# EAGLE board 13826-SparkFun_Tri_Axis_Accel_Breakout-H3LIS331DL_panel.v10 (EAGLE 7.5.0), part 1 of 4
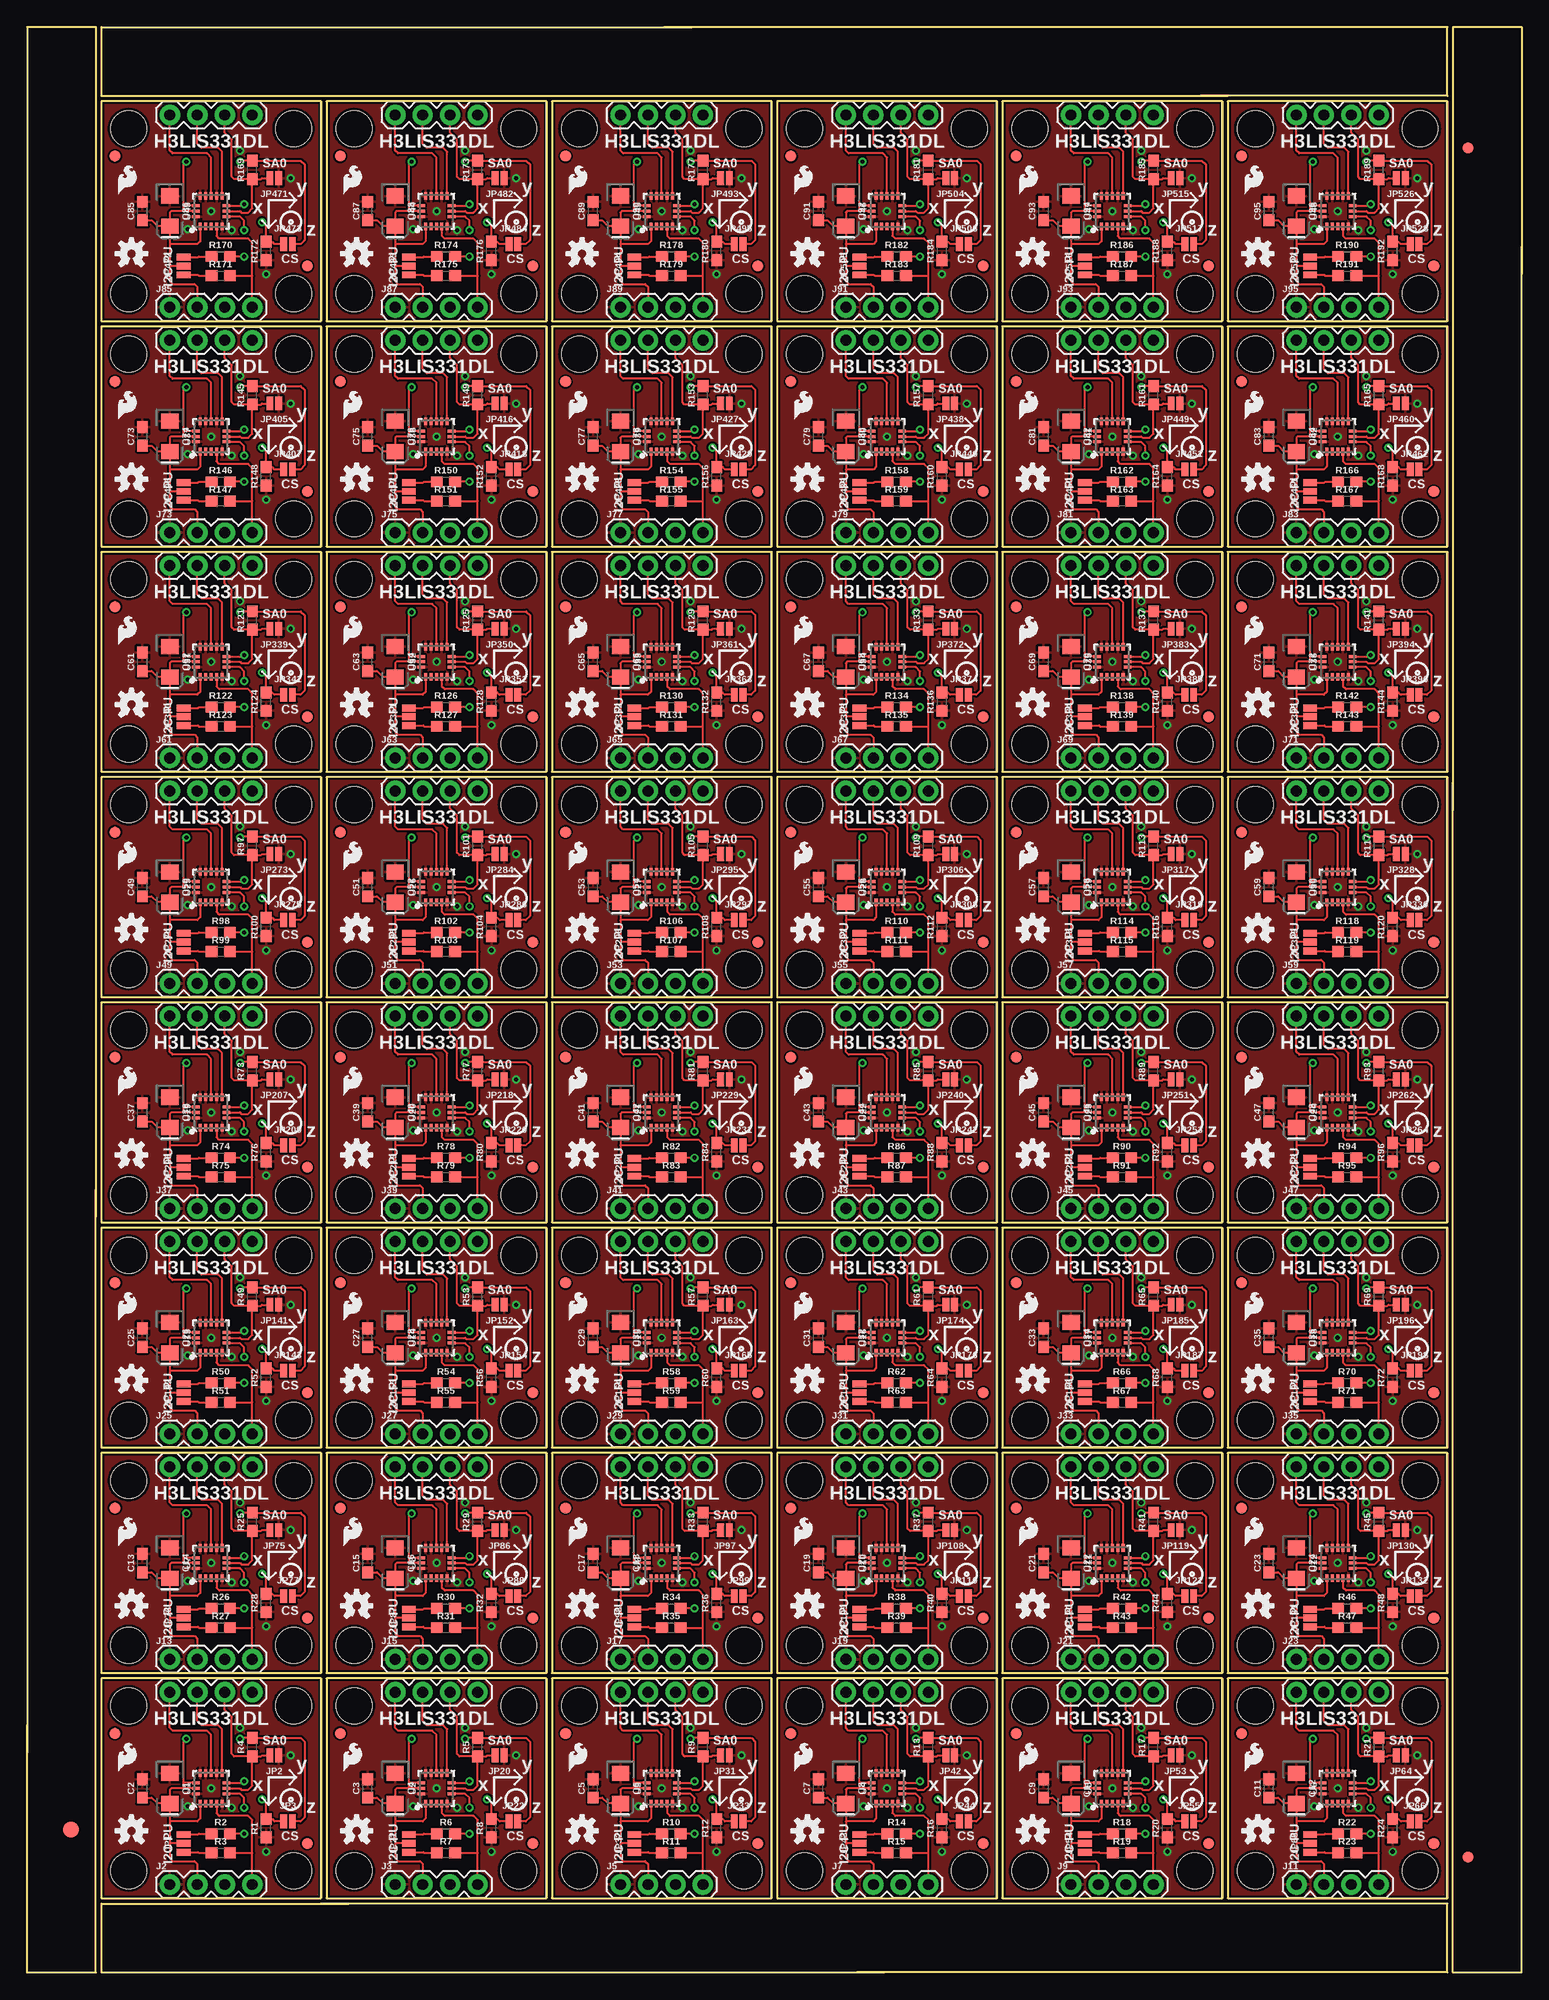
[diagram p0: board, top side]
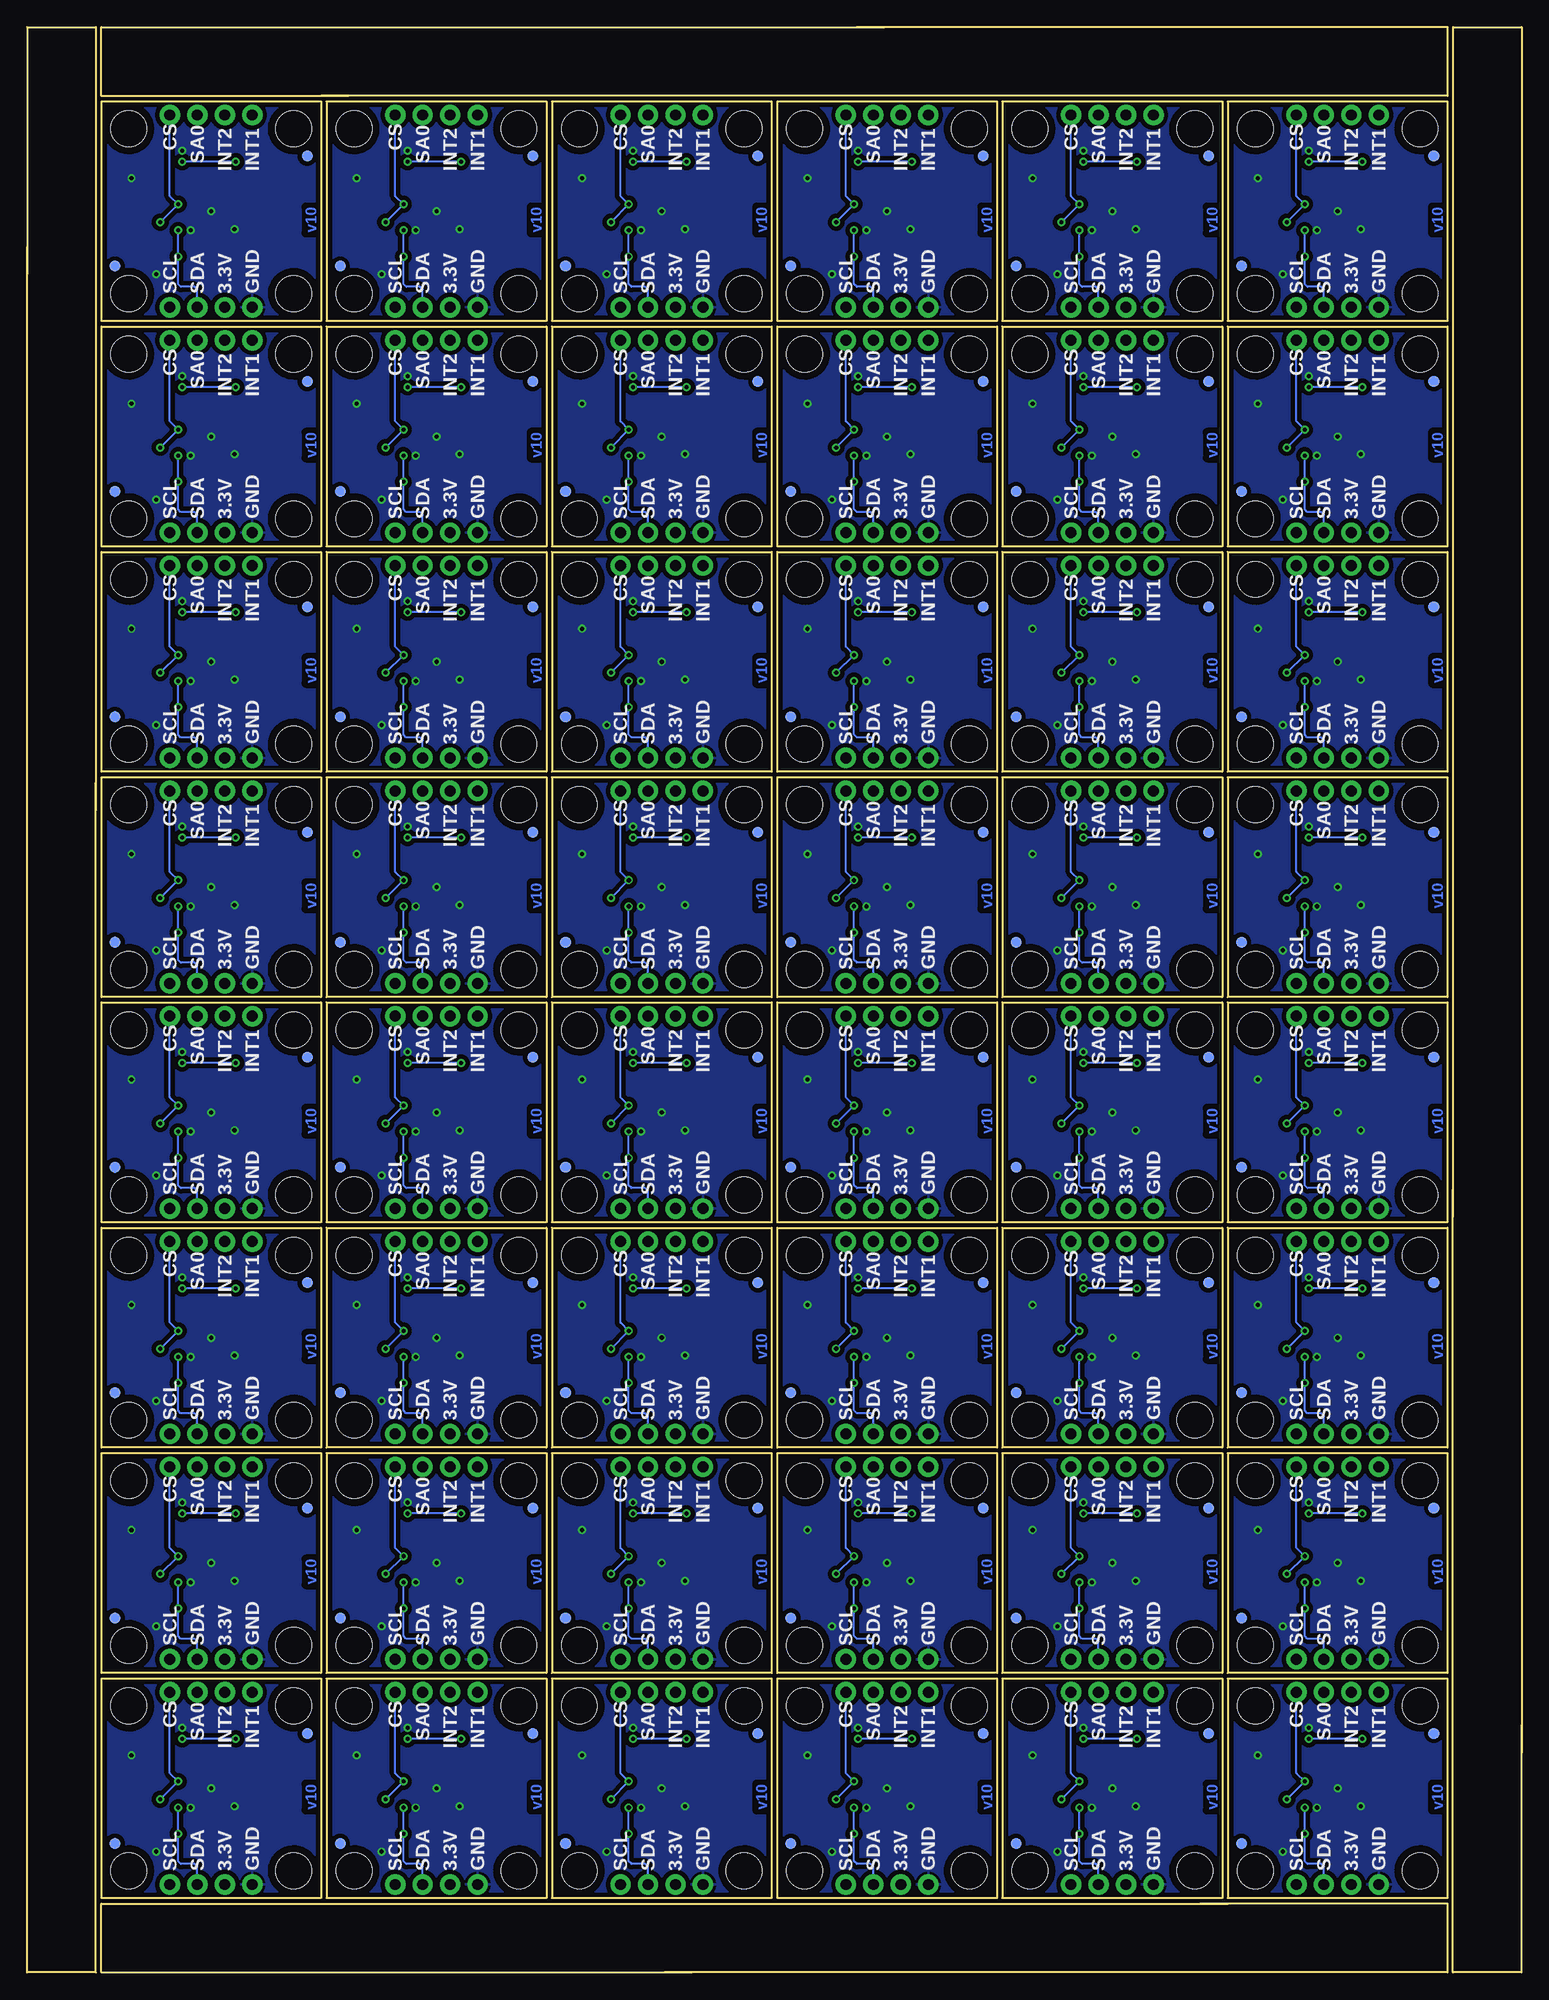
[diagram p1: board, bottom side, seen from below]

Size 138.18 x 179.83 mm. Coordinates in mm from the lower left corner, seen from the top.
Outline: 216 segments
Copper layers (1*16): Top 0.035mm / dielectric 1.5mm / Bottom 0.035mm
Design rules "SparkFun-2-layer-TIGHT": minimum track width 7mil, minimum drill 15mil, track to track 7mil, track to pad 7mil, pad to pad 7mil, via to via 7mil, smd to smd 7mil, copper to edge 7mil, drill to drill 7mil, minimum pad ring 7mil, minimum via ring 7mil, stop-mask expansion 4mil, vias tented up to drill 25mil, thermal gap 10mil
tRestrict: 48 lines

## Footprints (pad centres in the part's own frame; a part is rotated, then mirrored left to right if it is on the bottom)
EIA3216 = smd 1.4 x 1.6: + 1.4,0; - -1.4,0
0603 = smd 1.1 x 1: 1 -0.85,0; 2 0.85,0
FIDUCIAL-1.5X3 = smd 1.5 x 1.5: 1 0,0
FIDUCIAL-1X2 = smd 1 x 1: 1 0,0
1X04 = drill 1.016 pad 1.88: 1 0,0; 2 2.54,0; 3 5.08,0; 4 7.62,0
SMT-JUMPER_3_2-NC_PASTE_NO-SILK = smd 0.635 x 1.27: 1 -0.813,0; 2 0,0; 3 0.813,0
SMT-JUMPER_2_NO_NO-SILK = smd 0.635 x 1.27: 1 -0.406,0; 2 0.406,0
SMT-JUMPER_2_NC_PASTE_NO-SILK = smd 0.635 x 1.27: 1 -0.406,0; 2 0.406,0
STAND-OFF = hole 3.302: 0,0
LGA-16-3X3 = smd 0.7 x 0.28: 1 -1.4,1; 2 -1.4,0.5; 3 -1.4,0; 4 -1.4,-0.5; 5 -1.4,-1; 9 1.4,-1; 10 1.4,-0.5; 11 1.4,0; 12 1.4,0.5; 13 1.4,1 | smd 0.28 x 0.7: 6 -0.5,-1.4; 7 0,-1.4; 8 0.5,-1.4; 14 0.5,1.4; 15 0,1.4; 16 -0.5,1.4

## Placement (x,y rotation side)
C1  10uF  [EIA3216]  13.21,17.02 270 top
C2  0.1uF  [0603]  10.67,17.02 90 top
C3  0.1uF  [0603]  31.5,17.02 90 top
C4  10uF  [EIA3216]  34.04,17.02 270 top
C5  0.1uF  [0603]  52.32,17.02 90 top
C6  10uF  [EIA3216]  54.86,17.02 270 top
C7  0.1uF  [0603]  73.15,17.02 90 top
C8  10uF  [EIA3216]  75.69,17.02 270 top
C9  0.1uF  [0603]  93.98,17.02 90 top
C10  10uF  [EIA3216]  96.52,17.02 270 top
C11  0.1uF  [0603]  114.81,17.02 90 top
C12  10uF  [EIA3216]  117.35,17.02 270 top
C13  0.1uF  [0603]  10.67,37.85 90 top
C14  10uF  [EIA3216]  13.21,37.85 270 top
C15  0.1uF  [0603]  31.5,37.85 90 top
C16  10uF  [EIA3216]  34.04,37.85 270 top
C17  0.1uF  [0603]  52.32,37.85 90 top
C18  10uF  [EIA3216]  54.86,37.85 270 top
C19  0.1uF  [0603]  73.15,37.85 90 top
C20  10uF  [EIA3216]  75.69,37.85 270 top
C21  0.1uF  [0603]  93.98,37.85 90 top
C22  10uF  [EIA3216]  96.52,37.85 270 top
C23  0.1uF  [0603]  114.81,37.85 90 top
C24  10uF  [EIA3216]  117.35,37.85 270 top
C25  0.1uF  [0603]  10.67,58.67 90 top
C26  10uF  [EIA3216]  13.21,58.67 270 top
C27  0.1uF  [0603]  31.5,58.67 90 top
C28  10uF  [EIA3216]  34.04,58.67 270 top
C29  0.1uF  [0603]  52.32,58.67 90 top
C30  10uF  [EIA3216]  54.86,58.67 270 top
C31  0.1uF  [0603]  73.15,58.67 90 top
C32  10uF  [EIA3216]  75.69,58.67 270 top
C33  0.1uF  [0603]  93.98,58.67 90 top
C34  10uF  [EIA3216]  96.52,58.67 270 top
C35  0.1uF  [0603]  114.81,58.67 90 top
C36  10uF  [EIA3216]  117.35,58.67 270 top
C37  0.1uF  [0603]  10.67,79.5 90 top
C38  10uF  [EIA3216]  13.21,79.5 270 top
C39  0.1uF  [0603]  31.5,79.5 90 top
C40  10uF  [EIA3216]  34.04,79.5 270 top
C41  0.1uF  [0603]  52.32,79.5 90 top
C42  10uF  [EIA3216]  54.86,79.5 270 top
C43  0.1uF  [0603]  73.15,79.5 90 top
C44  10uF  [EIA3216]  75.69,79.5 270 top
C45  0.1uF  [0603]  93.98,79.5 90 top
C46  10uF  [EIA3216]  96.52,79.5 270 top
C47  0.1uF  [0603]  114.81,79.5 90 top
C48  10uF  [EIA3216]  117.35,79.5 270 top
C49  0.1uF  [0603]  10.67,100.33 90 top
C50  10uF  [EIA3216]  13.21,100.33 270 top
C51  0.1uF  [0603]  31.5,100.33 90 top
C52  10uF  [EIA3216]  34.04,100.33 270 top
C53  0.1uF  [0603]  52.32,100.33 90 top
C54  10uF  [EIA3216]  54.86,100.33 270 top
C55  0.1uF  [0603]  73.15,100.33 90 top
C56  10uF  [EIA3216]  75.69,100.33 270 top
C57  0.1uF  [0603]  93.98,100.33 90 top
C58  10uF  [EIA3216]  96.52,100.33 270 top
C59  0.1uF  [0603]  114.81,100.33 90 top
C60  10uF  [EIA3216]  117.35,100.33 270 top
C61  0.1uF  [0603]  10.67,121.16 90 top
C62  10uF  [EIA3216]  13.21,121.16 270 top
C63  0.1uF  [0603]  31.5,121.16 90 top
C64  10uF  [EIA3216]  34.04,121.16 270 top
C65  0.1uF  [0603]  52.32,121.16 90 top
C66  10uF  [EIA3216]  54.86,121.16 270 top
C67  0.1uF  [0603]  73.15,121.16 90 top
C68  10uF  [EIA3216]  75.69,121.16 270 top
C69  0.1uF  [0603]  93.98,121.16 90 top
C70  10uF  [EIA3216]  96.52,121.16 270 top
C71  0.1uF  [0603]  114.81,121.16 90 top
C72  10uF  [EIA3216]  117.35,121.16 270 top
C73  0.1uF  [0603]  10.67,141.99 90 top
C74  10uF  [EIA3216]  13.21,141.99 270 top
C75  0.1uF  [0603]  31.5,141.99 90 top
C76  10uF  [EIA3216]  34.04,141.99 270 top
C77  0.1uF  [0603]  52.32,141.99 90 top
C78  10uF  [EIA3216]  54.86,141.99 270 top
C79  0.1uF  [0603]  73.15,141.99 90 top
C80  10uF  [EIA3216]  75.69,141.99 270 top
C81  0.1uF  [0603]  93.98,141.99 90 top
C82  10uF  [EIA3216]  96.52,141.99 270 top
C83  0.1uF  [0603]  114.81,141.99 90 top
C84  10uF  [EIA3216]  117.35,141.99 270 top
C85  0.1uF  [0603]  10.67,162.81 90 top
C86  10uF  [EIA3216]  13.21,162.81 270 top
C87  0.1uF  [0603]  31.5,162.81 90 top
C88  10uF  [EIA3216]  34.04,162.81 270 top
C89  0.1uF  [0603]  52.32,162.81 90 top
C90  10uF  [EIA3216]  54.86,162.81 270 top
C91  0.1uF  [0603]  73.15,162.81 90 top
C92  10uF  [EIA3216]  75.69,162.81 270 top
C93  0.1uF  [0603]  93.98,162.81 90 top
C94  10uF  [EIA3216]  96.52,162.81 270 top
C95  0.1uF  [0603]  114.81,162.81 90 top
C96  10uF  [EIA3216]  117.35,162.81 270 top
E$1  [FIDUCIAL-1.5X3]  4.06,13.21 0 top
E$5  [FIDUCIAL-1X2]  133.22,168.66 180 top
E$6  [FIDUCIAL-1X2]  133.22,10.67 0 top
J1  [1X04]  13.21,25.91 0 top
J2  [1X04]  13.21,8.13 0 top
J3  [1X04]  34.04,8.13 0 top
J4  [1X04]  34.04,25.91 0 top
J5  [1X04]  54.86,8.13 0 top
J6  [1X04]  54.86,25.91 0 top
J7  [1X04]  75.69,8.13 0 top
J8  [1X04]  75.69,25.91 0 top
J9  [1X04]  96.52,8.13 0 top
J10  [1X04]  96.52,25.91 0 top
J11  [1X04]  117.35,8.13 0 top
J12  [1X04]  117.35,25.91 0 top
J13  [1X04]  13.21,28.96 0 top
J14  [1X04]  13.21,46.74 0 top
J15  [1X04]  34.04,28.96 0 top
J16  [1X04]  34.04,46.74 0 top
J17  [1X04]  54.86,28.96 0 top
J18  [1X04]  54.86,46.74 0 top
J19  [1X04]  75.69,28.96 0 top
J20  [1X04]  75.69,46.74 0 top
J21  [1X04]  96.52,28.96 0 top
J22  [1X04]  96.52,46.74 0 top
J23  [1X04]  117.35,28.96 0 top
J24  [1X04]  117.35,46.74 0 top
J25  [1X04]  13.21,49.78 0 top
J26  [1X04]  13.21,67.56 0 top
J27  [1X04]  34.04,49.78 0 top
J28  [1X04]  34.04,67.56 0 top
J29  [1X04]  54.86,49.78 0 top
J30  [1X04]  54.86,67.56 0 top
J31  [1X04]  75.69,49.78 0 top
J32  [1X04]  75.69,67.56 0 top
J33  [1X04]  96.52,49.78 0 top
J34  [1X04]  96.52,67.56 0 top
J35  [1X04]  117.35,49.78 0 top
J36  [1X04]  117.35,67.56 0 top
J37  [1X04]  13.21,70.61 0 top
J38  [1X04]  13.21,88.39 0 top
J39  [1X04]  34.04,70.61 0 top
J40  [1X04]  34.04,88.39 0 top
J41  [1X04]  54.86,70.61 0 top
J42  [1X04]  54.86,88.39 0 top
J43  [1X04]  75.69,70.61 0 top
J44  [1X04]  75.69,88.39 0 top
J45  [1X04]  96.52,70.61 0 top
J46  [1X04]  96.52,88.39 0 top
J47  [1X04]  117.35,70.61 0 top
J48  [1X04]  117.35,88.39 0 top
J49  [1X04]  13.21,91.44 0 top
J50  [1X04]  13.21,109.22 0 top
J51  [1X04]  34.04,91.44 0 top
J52  [1X04]  34.04,109.22 0 top
J53  [1X04]  54.86,91.44 0 top
J54  [1X04]  54.86,109.22 0 top
J55  [1X04]  75.69,91.44 0 top
J56  [1X04]  75.69,109.22 0 top
J57  [1X04]  96.52,91.44 0 top
J58  [1X04]  96.52,109.22 0 top
J59  [1X04]  117.35,91.44 0 top
J60  [1X04]  117.35,109.22 0 top
J61  [1X04]  13.21,112.27 0 top
J62  [1X04]  13.21,130.05 0 top
J63  [1X04]  34.04,112.27 0 top
J64  [1X04]  34.04,130.05 0 top
J65  [1X04]  54.86,112.27 0 top
J66  [1X04]  54.86,130.05 0 top
J67  [1X04]  75.69,112.27 0 top
J68  [1X04]  75.69,130.05 0 top
J69  [1X04]  96.52,112.27 0 top
J70  [1X04]  96.52,130.05 0 top
J71  [1X04]  117.35,112.27 0 top
J72  [1X04]  117.35,130.05 0 top
J73  [1X04]  13.21,133.1 0 top
J74  [1X04]  13.21,150.88 0 top
J75  [1X04]  34.04,133.1 0 top
J76  [1X04]  34.04,150.88 0 top
J77  [1X04]  54.86,133.1 0 top
J78  [1X04]  54.86,150.88 0 top
J79  [1X04]  75.69,133.1 0 top
J80  [1X04]  75.69,150.88 0 top
J81  [1X04]  96.52,133.1 0 top
J82  [1X04]  96.52,150.88 0 top
J83  [1X04]  117.35,133.1 0 top
J84  [1X04]  117.35,150.88 0 top
J85  [1X04]  13.21,153.92 0 top
J86  [1X04]  13.21,171.7 0 top
J87  [1X04]  34.04,153.92 0 top
J88  [1X04]  34.04,171.7 0 top
J89  [1X04]  54.86,153.92 0 top
J90  [1X04]  54.86,171.7 0 top
J91  [1X04]  75.69,153.92 0 top
J92  [1X04]  75.69,171.7 0 top
J93  [1X04]  96.52,153.92 0 top
J94  [1X04]  96.52,171.7 0 top
J95  [1X04]  117.35,153.92 0 top
J96  [1X04]  117.35,171.7 0 top
JP1  JUMPER-SMT_3_2-NC_PASTE_NO-SILK  [SMT-JUMPER_3_2-NC_PASTE_NO-SILK]  14.48,11.94 90 top
JP2  JUMPER-SMT_2_NO_NO-SILK  [SMT-JUMPER_2_NO_NO-SILK]  22.86,20.07 180 top
JP3  JUMPER-SMT_2_NC_PASTE_NO-SILK  [SMT-JUMPER_2_NC_PASTE_NO-SILK]  24.13,13.97 0 top
JP4  FIDUCIAL1X2  [FIDUCIAL-1X2]  8.13,22.1 0 top
JP5  FIDUCIAL1X2  [FIDUCIAL-1X2]  8.13,22.1 0 bottom
JP6  FIDUCIAL1X2  [FIDUCIAL-1X2]  25.91,11.94 0 top
JP7  FIDUCIAL1X2  [FIDUCIAL-1X2]  25.91,11.94 0 bottom
JP8  STAND-OFF  [STAND-OFF]  24.64,9.4 0 top
JP9  STAND-OFF  [STAND-OFF]  9.4,9.4 0 top
JP10  STAND-OFF  [STAND-OFF]  24.64,24.64 0 top
JP11  STAND-OFF  [STAND-OFF]  9.4,24.64 0 top
JP12  STAND-OFF  [STAND-OFF]  30.23,24.64 0 top
JP13  STAND-OFF  [STAND-OFF]  45.47,24.64 0 top
JP14  FIDUCIAL1X2  [FIDUCIAL-1X2]  28.96,22.1 0 top
JP15  FIDUCIAL1X2  [FIDUCIAL-1X2]  46.74,11.94 0 top
JP16  STAND-OFF  [STAND-OFF]  45.47,9.4 0 top
JP17  STAND-OFF  [STAND-OFF]  30.23,9.4 0 top
JP18  FIDUCIAL1X2  [FIDUCIAL-1X2]  28.96,22.1 0 bottom
JP19  FIDUCIAL1X2  [FIDUCIAL-1X2]  46.74,11.94 0 bottom
JP20  JUMPER-SMT_2_NO_NO-SILK  [SMT-JUMPER_2_NO_NO-SILK]  43.69,20.07 180 top
JP21  JUMPER-SMT_3_2-NC_PASTE_NO-SILK  [SMT-JUMPER_3_2-NC_PASTE_NO-SILK]  35.31,11.94 90 top
JP22  JUMPER-SMT_2_NC_PASTE_NO-SILK  [SMT-JUMPER_2_NC_PASTE_NO-SILK]  44.96,13.97 0 top
JP23  STAND-OFF  [STAND-OFF]  51.05,24.64 0 top
JP24  STAND-OFF  [STAND-OFF]  66.29,24.64 0 top
JP25  FIDUCIAL1X2  [FIDUCIAL-1X2]  49.78,22.1 0 top
JP26  FIDUCIAL1X2  [FIDUCIAL-1X2]  67.56,11.94 0 top
JP27  STAND-OFF  [STAND-OFF]  66.29,9.4 0 top
JP28  STAND-OFF  [STAND-OFF]  51.05,9.4 0 top
JP29  FIDUCIAL1X2  [FIDUCIAL-1X2]  49.78,22.1 0 bottom
JP30  FIDUCIAL1X2  [FIDUCIAL-1X2]  67.56,11.94 0 bottom
JP31  JUMPER-SMT_2_NO_NO-SILK  [SMT-JUMPER_2_NO_NO-SILK]  64.52,20.07 180 top
JP32  JUMPER-SMT_3_2-NC_PASTE_NO-SILK  [SMT-JUMPER_3_2-NC_PASTE_NO-SILK]  56.13,11.94 90 top
JP33  JUMPER-SMT_2_NC_PASTE_NO-SILK  [SMT-JUMPER_2_NC_PASTE_NO-SILK]  65.79,13.97 0 top
JP34  STAND-OFF  [STAND-OFF]  71.88,24.64 0 top
JP35  STAND-OFF  [STAND-OFF]  87.12,24.64 0 top
JP36  FIDUCIAL1X2  [FIDUCIAL-1X2]  70.61,22.1 0 top
JP37  FIDUCIAL1X2  [FIDUCIAL-1X2]  88.39,11.94 0 top
JP38  STAND-OFF  [STAND-OFF]  87.12,9.4 0 top
JP39  STAND-OFF  [STAND-OFF]  71.88,9.4 0 top
JP40  FIDUCIAL1X2  [FIDUCIAL-1X2]  70.61,22.1 0 bottom
JP41  FIDUCIAL1X2  [FIDUCIAL-1X2]  88.39,11.94 0 bottom
JP42  JUMPER-SMT_2_NO_NO-SILK  [SMT-JUMPER_2_NO_NO-SILK]  85.34,20.07 180 top
JP43  JUMPER-SMT_3_2-NC_PASTE_NO-SILK  [SMT-JUMPER_3_2-NC_PASTE_NO-SILK]  76.96,11.94 90 top
JP44  JUMPER-SMT_2_NC_PASTE_NO-SILK  [SMT-JUMPER_2_NC_PASTE_NO-SILK]  86.61,13.97 0 top
JP45  STAND-OFF  [STAND-OFF]  92.71,24.64 0 top
JP46  STAND-OFF  [STAND-OFF]  107.95,24.64 0 top
JP47  FIDUCIAL1X2  [FIDUCIAL-1X2]  91.44,22.1 0 top
JP48  FIDUCIAL1X2  [FIDUCIAL-1X2]  109.22,11.94 0 top
JP49  STAND-OFF  [STAND-OFF]  107.95,9.4 0 top
JP50  STAND-OFF  [STAND-OFF]  92.71,9.4 0 top
JP51  FIDUCIAL1X2  [FIDUCIAL-1X2]  91.44,22.1 0 bottom
JP52  FIDUCIAL1X2  [FIDUCIAL-1X2]  109.22,11.94 0 bottom
JP53  JUMPER-SMT_2_NO_NO-SILK  [SMT-JUMPER_2_NO_NO-SILK]  106.17,20.07 180 top
JP54  JUMPER-SMT_3_2-NC_PASTE_NO-SILK  [SMT-JUMPER_3_2-NC_PASTE_NO-SILK]  97.79,11.94 90 top
JP55  JUMPER-SMT_2_NC_PASTE_NO-SILK  [SMT-JUMPER_2_NC_PASTE_NO-SILK]  107.44,13.97 0 top
JP56  STAND-OFF  [STAND-OFF]  113.54,24.64 0 top
JP57  STAND-OFF  [STAND-OFF]  128.78,24.64 0 top
JP58  FIDUCIAL1X2  [FIDUCIAL-1X2]  112.27,22.1 0 top
JP59  FIDUCIAL1X2  [FIDUCIAL-1X2]  130.05,11.94 0 top
JP60  STAND-OFF  [STAND-OFF]  128.78,9.4 0 top
JP61  STAND-OFF  [STAND-OFF]  113.54,9.4 0 top
JP62  FIDUCIAL1X2  [FIDUCIAL-1X2]  112.27,22.1 0 bottom
JP63  FIDUCIAL1X2  [FIDUCIAL-1X2]  130.05,11.94 0 bottom
JP64  JUMPER-SMT_2_NO_NO-SILK  [SMT-JUMPER_2_NO_NO-SILK]  127,20.07 180 top
JP65  JUMPER-SMT_3_2-NC_PASTE_NO-SILK  [SMT-JUMPER_3_2-NC_PASTE_NO-SILK]  118.62,11.94 90 top
JP66  JUMPER-SMT_2_NC_PASTE_NO-SILK  [SMT-JUMPER_2_NC_PASTE_NO-SILK]  128.27,13.97 0 top
JP67  STAND-OFF  [STAND-OFF]  9.4,45.47 0 top
JP68  STAND-OFF  [STAND-OFF]  24.64,45.47 0 top
JP69  FIDUCIAL1X2  [FIDUCIAL-1X2]  8.13,42.93 0 top
JP70  FIDUCIAL1X2  [FIDUCIAL-1X2]  25.91,32.77 0 top
JP71  STAND-OFF  [STAND-OFF]  24.64,30.23 0 top
JP72  STAND-OFF  [STAND-OFF]  9.4,30.23 0 top
JP73  FIDUCIAL1X2  [FIDUCIAL-1X2]  8.13,42.93 0 bottom
JP74  FIDUCIAL1X2  [FIDUCIAL-1X2]  25.91,32.77 0 bottom
JP75  JUMPER-SMT_2_NO_NO-SILK  [SMT-JUMPER_2_NO_NO-SILK]  22.86,40.89 180 top
JP76  JUMPER-SMT_3_2-NC_PASTE_NO-SILK  [SMT-JUMPER_3_2-NC_PASTE_NO-SILK]  14.48,32.77 90 top
JP77  JUMPER-SMT_2_NC_PASTE_NO-SILK  [SMT-JUMPER_2_NC_PASTE_NO-SILK]  24.13,34.8 0 top
JP78  STAND-OFF  [STAND-OFF]  30.23,45.47 0 top
JP79  STAND-OFF  [STAND-OFF]  45.47,45.47 0 top
JP80  FIDUCIAL1X2  [FIDUCIAL-1X2]  28.96,42.93 0 top
JP81  FIDUCIAL1X2  [FIDUCIAL-1X2]  46.74,32.77 0 top
JP82  STAND-OFF  [STAND-OFF]  45.47,30.23 0 top
JP83  STAND-OFF  [STAND-OFF]  30.23,30.23 0 top
JP84  FIDUCIAL1X2  [FIDUCIAL-1X2]  28.96,42.93 0 bottom
JP85  FIDUCIAL1X2  [FIDUCIAL-1X2]  46.74,32.77 0 bottom
JP86  JUMPER-SMT_2_NO_NO-SILK  [SMT-JUMPER_2_NO_NO-SILK]  43.69,40.89 180 top
JP87  JUMPER-SMT_3_2-NC_PASTE_NO-SILK  [SMT-JUMPER_3_2-NC_PASTE_NO-SILK]  35.31,32.77 90 top
JP88  JUMPER-SMT_2_NC_PASTE_NO-SILK  [SMT-JUMPER_2_NC_PASTE_NO-SILK]  44.96,34.8 0 top
JP89  STAND-OFF  [STAND-OFF]  51.05,45.47 0 top
JP90  STAND-OFF  [STAND-OFF]  66.29,45.47 0 top
JP91  FIDUCIAL1X2  [FIDUCIAL-1X2]  49.78,42.93 0 top
JP92  FIDUCIAL1X2  [FIDUCIAL-1X2]  67.56,32.77 0 top
JP93  STAND-OFF  [STAND-OFF]  66.29,30.23 0 top
JP94  STAND-OFF  [STAND-OFF]  51.05,30.23 0 top
JP95  FIDUCIAL1X2  [FIDUCIAL-1X2]  49.78,42.93 0 bottom
JP96  FIDUCIAL1X2  [FIDUCIAL-1X2]  67.56,32.77 0 bottom
JP97  JUMPER-SMT_2_NO_NO-SILK  [SMT-JUMPER_2_NO_NO-SILK]  64.52,40.89 180 top
JP98  JUMPER-SMT_3_2-NC_PASTE_NO-SILK  [SMT-JUMPER_3_2-NC_PASTE_NO-SILK]  56.13,32.77 90 top
JP99  JUMPER-SMT_2_NC_PASTE_NO-SILK  [SMT-JUMPER_2_NC_PASTE_NO-SILK]  65.79,34.8 0 top
JP100  STAND-OFF  [STAND-OFF]  71.88,45.47 0 top
JP101  STAND-OFF  [STAND-OFF]  87.12,45.47 0 top
JP102  FIDUCIAL1X2  [FIDUCIAL-1X2]  70.61,42.93 0 top
JP103  FIDUCIAL1X2  [FIDUCIAL-1X2]  88.39,32.77 0 top
JP104  STAND-OFF  [STAND-OFF]  87.12,30.23 0 top
JP105  STAND-OFF  [STAND-OFF]  71.88,30.23 0 top
JP106  FIDUCIAL1X2  [FIDUCIAL-1X2]  70.61,42.93 0 bottom
JP107  FIDUCIAL1X2  [FIDUCIAL-1X2]  88.39,32.77 0 bottom
JP108  JUMPER-SMT_2_NO_NO-SILK  [SMT-JUMPER_2_NO_NO-SILK]  85.34,40.89 180 top
JP109  JUMPER-SMT_3_2-NC_PASTE_NO-SILK  [SMT-JUMPER_3_2-NC_PASTE_NO-SILK]  76.96,32.77 90 top
JP110  JUMPER-SMT_2_NC_PASTE_NO-SILK  [SMT-JUMPER_2_NC_PASTE_NO-SILK]  86.61,34.8 0 top
JP111  STAND-OFF  [STAND-OFF]  92.71,45.47 0 top
JP112  STAND-OFF  [STAND-OFF]  107.95,45.47 0 top
JP113  FIDUCIAL1X2  [FIDUCIAL-1X2]  91.44,42.93 0 top
JP114  FIDUCIAL1X2  [FIDUCIAL-1X2]  109.22,32.77 0 top
JP115  STAND-OFF  [STAND-OFF]  107.95,30.23 0 top
JP116  STAND-OFF  [STAND-OFF]  92.71,30.23 0 top
JP117  FIDUCIAL1X2  [FIDUCIAL-1X2]  91.44,42.93 0 bottom
JP118  FIDUCIAL1X2  [FIDUCIAL-1X2]  109.22,32.77 0 bottom
JP119  JUMPER-SMT_2_NO_NO-SILK  [SMT-JUMPER_2_NO_NO-SILK]  106.17,40.89 180 top
JP120  JUMPER-SMT_3_2-NC_PASTE_NO-SILK  [SMT-JUMPER_3_2-NC_PASTE_NO-SILK]  97.79,32.77 90 top
JP121  JUMPER-SMT_2_NC_PASTE_NO-SILK  [SMT-JUMPER_2_NC_PASTE_NO-SILK]  107.44,34.8 0 top
JP122  STAND-OFF  [STAND-OFF]  113.54,45.47 0 top
JP123  STAND-OFF  [STAND-OFF]  128.78,45.47 0 top
JP124  FIDUCIAL1X2  [FIDUCIAL-1X2]  112.27,42.93 0 top
JP125  FIDUCIAL1X2  [FIDUCIAL-1X2]  130.05,32.77 0 top
JP126  STAND-OFF  [STAND-OFF]  128.78,30.23 0 top
JP127  STAND-OFF  [STAND-OFF]  113.54,30.23 0 top
JP128  FIDUCIAL1X2  [FIDUCIAL-1X2]  112.27,42.93 0 bottom
JP129  FIDUCIAL1X2  [FIDUCIAL-1X2]  130.05,32.77 0 bottom
JP130  JUMPER-SMT_2_NO_NO-SILK  [SMT-JUMPER_2_NO_NO-SILK]  127,40.89 180 top
JP131  JUMPER-SMT_3_2-NC_PASTE_NO-SILK  [SMT-JUMPER_3_2-NC_PASTE_NO-SILK]  118.62,32.77 90 top
JP132  JUMPER-SMT_2_NC_PASTE_NO-SILK  [SMT-JUMPER_2_NC_PASTE_NO-SILK]  128.27,34.8 0 top
JP133  STAND-OFF  [STAND-OFF]  9.4,66.29 0 top
JP134  STAND-OFF  [STAND-OFF]  24.64,66.29 0 top
JP135  FIDUCIAL1X2  [FIDUCIAL-1X2]  8.13,63.75 0 top
JP136  FIDUCIAL1X2  [FIDUCIAL-1X2]  25.91,53.59 0 top
JP137  STAND-OFF  [STAND-OFF]  24.64,51.05 0 top
JP138  STAND-OFF  [STAND-OFF]  9.4,51.05 0 top
JP139  FIDUCIAL1X2  [FIDUCIAL-1X2]  8.13,63.75 0 bottom
JP140  FIDUCIAL1X2  [FIDUCIAL-1X2]  25.91,53.59 0 bottom
JP141  JUMPER-SMT_2_NO_NO-SILK  [SMT-JUMPER_2_NO_NO-SILK]  22.86,61.72 180 top
JP142  JUMPER-SMT_3_2-NC_PASTE_NO-SILK  [SMT-JUMPER_3_2-NC_PASTE_NO-SILK]  14.48,53.59 90 top
JP143  JUMPER-SMT_2_NC_PASTE_NO-SILK  [SMT-JUMPER_2_NC_PASTE_NO-SILK]  24.13,55.63 0 top
JP144  STAND-OFF  [STAND-OFF]  30.23,66.29 0 top
JP145  STAND-OFF  [STAND-OFF]  45.47,66.29 0 top
JP146  FIDUCIAL1X2  [FIDUCIAL-1X2]  28.96,63.75 0 top
JP147  FIDUCIAL1X2  [FIDUCIAL-1X2]  46.74,53.59 0 top
JP148  STAND-OFF  [STAND-OFF]  45.47,51.05 0 top
JP149  STAND-OFF  [STAND-OFF]  30.23,51.05 0 top
JP150  FIDUCIAL1X2  [FIDUCIAL-1X2]  28.96,63.75 0 bottom
JP151  FIDUCIAL1X2  [FIDUCIAL-1X2]  46.74,53.59 0 bottom
JP152  JUMPER-SMT_2_NO_NO-SILK  [SMT-JUMPER_2_NO_NO-SILK]  43.69,61.72 180 top
JP153  JUMPER-SMT_3_2-NC_PASTE_NO-SILK  [SMT-JUMPER_3_2-NC_PASTE_NO-SILK]  35.31,53.59 90 top
JP154  JUMPER-SMT_2_NC_PASTE_NO-SILK  [SMT-JUMPER_2_NC_PASTE_NO-SILK]  44.96,55.63 0 top
JP155  STAND-OFF  [STAND-OFF]  51.05,66.29 0 top
JP156  STAND-OFF  [STAND-OFF]  66.29,66.29 0 top
JP157  FIDUCIAL1X2  [FIDUCIAL-1X2]  49.78,63.75 0 top
JP158  FIDUCIAL1X2  [FIDUCIAL-1X2]  67.56,53.59 0 top
JP159  STAND-OFF  [STAND-OFF]  66.29,51.05 0 top
JP160  STAND-OFF  [STAND-OFF]  51.05,51.05 0 top
JP161  FIDUCIAL1X2  [FIDUCIAL-1X2]  49.78,63.75 0 bottom
JP162  FIDUCIAL1X2  [FIDUCIAL-1X2]  67.56,53.59 0 bottom
JP163  JUMPER-SMT_2_NO_NO-SILK  [SMT-JUMPER_2_NO_NO-SILK]  64.52,61.72 180 top
JP164  JUMPER-SMT_3_2-NC_PASTE_NO-SILK  [SMT-JUMPER_3_2-NC_PASTE_NO-SILK]  56.13,53.59 90 top
JP165  JUMPER-SMT_2_NC_PASTE_NO-SILK  [SMT-JUMPER_2_NC_PASTE_NO-SILK]  65.79,55.63 0 top
JP166  STAND-OFF  [STAND-OFF]  71.88,66.29 0 top
JP167  STAND-OFF  [STAND-OFF]  87.12,66.29 0 top
JP168  FIDUCIAL1X2  [FIDUCIAL-1X2]  70.61,63.75 0 top
JP169  FIDUCIAL1X2  [FIDUCIAL-1X2]  88.39,53.59 0 top
JP170  STAND-OFF  [STAND-OFF]  87.12,51.05 0 top
JP171  STAND-OFF  [STAND-OFF]  71.88,51.05 0 top
JP172  FIDUCIAL1X2  [FIDUCIAL-1X2]  70.61,63.75 0 bottom
JP173  FIDUCIAL1X2  [FIDUCIAL-1X2]  88.39,53.59 0 bottom
JP174  JUMPER-SMT_2_NO_NO-SILK  [SMT-JUMPER_2_NO_NO-SILK]  85.34,61.72 180 top
JP175  JUMPER-SMT_3_2-NC_PASTE_NO-SILK  [SMT-JUMPER_3_2-NC_PASTE_NO-SILK]  76.96,53.59 90 top
JP176  JUMPER-SMT_2_NC_PASTE_NO-SILK  [SMT-JUMPER_2_NC_PASTE_NO-SILK]  86.61,55.63 0 top
JP177  STAND-OFF  [STAND-OFF]  92.71,66.29 0 top
JP178  STAND-OFF  [STAND-OFF]  107.95,66.29 0 top
JP179  FIDUCIAL1X2  [FIDUCIAL-1X2]  91.44,63.75 0 top
JP180  FIDUCIAL1X2  [FIDUCIAL-1X2]  109.22,53.59 0 top
JP181  STAND-OFF  [STAND-OFF]  107.95,51.05 0 top
JP182  STAND-OFF  [STAND-OFF]  92.71,51.05 0 top
JP183  FIDUCIAL1X2  [FIDUCIAL-1X2]  91.44,63.75 0 bottom
JP184  FIDUCIAL1X2  [FIDUCIAL-1X2]  109.22,53.59 0 bottom
JP185  JUMPER-SMT_2_NO_NO-SILK  [SMT-JUMPER_2_NO_NO-SILK]  106.17,61.72 180 top
JP186  JUMPER-SMT_3_2-NC_PASTE_NO-SILK  [SMT-JUMPER_3_2-NC_PASTE_NO-SILK]  97.79,53.59 90 top
JP187  JUMPER-SMT_2_NC_PASTE_NO-SILK  [SMT-JUMPER_2_NC_PASTE_NO-SILK]  107.44,55.63 0 top
JP188  STAND-OFF  [STAND-OFF]  113.54,66.29 0 top
JP189  STAND-OFF  [STAND-OFF]  128.78,66.29 0 top
JP190  FIDUCIAL1X2  [FIDUCIAL-1X2]  112.27,63.75 0 top
JP191  FIDUCIAL1X2  [FIDUCIAL-1X2]  130.05,53.59 0 top
JP192  STAND-OFF  [STAND-OFF]  128.78,51.05 0 top
JP193  STAND-OFF  [STAND-OFF]  113.54,51.05 0 top
JP194  FIDUCIAL1X2  [FIDUCIAL-1X2]  112.27,63.75 0 bottom
JP195  FIDUCIAL1X2  [FIDUCIAL-1X2]  130.05,53.59 0 bottom
JP196  JUMPER-SMT_2_NO_NO-SILK  [SMT-JUMPER_2_NO_NO-SILK]  127,61.72 180 top
JP197  JUMPER-SMT_3_2-NC_PASTE_NO-SILK  [SMT-JUMPER_3_2-NC_PASTE_NO-SILK]  118.62,53.59 90 top
JP198  JUMPER-SMT_2_NC_PASTE_NO-SILK  [SMT-JUMPER_2_NC_PASTE_NO-SILK]  128.27,55.63 0 top
JP199  STAND-OFF  [STAND-OFF]  9.4,87.12 0 top
JP200  STAND-OFF  [STAND-OFF]  24.64,87.12 0 top
JP201  FIDUCIAL1X2  [FIDUCIAL-1X2]  8.13,84.58 0 top
JP202  FIDUCIAL1X2  [FIDUCIAL-1X2]  25.91,74.42 0 top
JP203  STAND-OFF  [STAND-OFF]  24.64,71.88 0 top
JP204  STAND-OFF  [STAND-OFF]  9.4,71.88 0 top
JP205  FIDUCIAL1X2  [FIDUCIAL-1X2]  8.13,84.58 0 bottom
JP206  FIDUCIAL1X2  [FIDUCIAL-1X2]  25.91,74.42 0 bottom
JP207  JUMPER-SMT_2_NO_NO-SILK  [SMT-JUMPER_2_NO_NO-SILK]  22.86,82.55 180 top
JP208  JUMPER-SMT_3_2-NC_PASTE_NO-SILK  [SMT-JUMPER_3_2-NC_PASTE_NO-SILK]  14.48,74.42 90 top
JP209  JUMPER-SMT_2_NC_PASTE_NO-SILK  [SMT-JUMPER_2_NC_PASTE_NO-SILK]  24.13,76.45 0 top
JP210  STAND-OFF  [STAND-OFF]  30.23,87.12 0 top
JP211  STAND-OFF  [STAND-OFF]  45.47,87.12 0 top
JP212  FIDUCIAL1X2  [FIDUCIAL-1X2]  28.96,84.58 0 top
JP213  FIDUCIAL1X2  [FIDUCIAL-1X2]  46.74,74.42 0 top
JP214  STAND-OFF  [STAND-OFF]  45.47,71.88 0 top
JP215  STAND-OFF  [STAND-OFF]  30.23,71.88 0 top
JP216  FIDUCIAL1X2  [FIDUCIAL-1X2]  28.96,84.58 0 bottom
JP217  FIDUCIAL1X2  [FIDUCIAL-1X2]  46.74,74.42 0 bottom
JP218  JUMPER-SMT_2_NO_NO-SILK  [SMT-JUMPER_2_NO_NO-SILK]  43.69,82.55 180 top
JP219  JUMPER-SMT_3_2-NC_PASTE_NO-SILK  [SMT-JUMPER_3_2-NC_PASTE_NO-SILK]  35.31,74.42 90 top
JP220  JUMPER-SMT_2_NC_PASTE_NO-SILK  [SMT-JUMPER_2_NC_PASTE_NO-SILK]  44.96,76.45 0 top
JP221  STAND-OFF  [STAND-OFF]  51.05,87.12 0 top
JP222  STAND-OFF  [STAND-OFF]  66.29,87.12 0 top
JP223  FIDUCIAL1X2  [FIDUCIAL-1X2]  49.78,84.58 0 top
JP224  FIDUCIAL1X2  [FIDUCIAL-1X2]  67.56,74.42 0 top
JP225  STAND-OFF  [STAND-OFF]  66.29,71.88 0 top
JP226  STAND-OFF  [STAND-OFF]  51.05,71.88 0 top
JP227  FIDUCIAL1X2  [FIDUCIAL-1X2]  49.78,84.58 0 bottom
JP228  FIDUCIAL1X2  [FIDUCIAL-1X2]  67.56,74.42 0 bottom
JP229  JUMPER-SMT_2_NO_NO-SILK  [SMT-JUMPER_2_NO_NO-SILK]  64.52,82.55 180 top
JP230  JUMPER-SMT_3_2-NC_PASTE_NO-SILK  [SMT-JUMPER_3_2-NC_PASTE_NO-SILK]  56.13,74.42 90 top
JP231  JUMPER-SMT_2_NC_PASTE_NO-SILK  [SMT-JUMPER_2_NC_PASTE_NO-SILK]  65.79,76.45 0 top
JP232  STAND-OFF  [STAND-OFF]  71.88,87.12 0 top
JP233  STAND-OFF  [STAND-OFF]  87.12,87.12 0 top
JP234  FIDUCIAL1X2  [FIDUCIAL-1X2]  70.61,84.58 0 top
JP235  FIDUCIAL1X2  [FIDUCIAL-1X2]  88.39,74.42 0 top
JP236  STAND-OFF  [STAND-OFF]  87.12,71.88 0 top
JP237  STAND-OFF  [STAND-OFF]  71.88,71.88 0 top
JP238  FIDUCIAL1X2  [FIDUCIAL-1X2]  70.61,84.58 0 bottom
JP239  FIDUCIAL1X2  [FIDUCIAL-1X2]  88.39,74.42 0 bottom
JP240  JUMPER-SMT_2_NO_NO-SILK  [SMT-JUMPER_2_NO_NO-SILK]  85.34,82.55 180 top
JP241  JUMPER-SMT_3_2-NC_PASTE_NO-SILK  [SMT-JUMPER_3_2-NC_PASTE_NO-SILK]  76.96,74.42 90 top
JP242  JUMPER-SMT_2_NC_PASTE_NO-SILK  [SMT-JUMPER_2_NC_PASTE_NO-SILK]  86.61,76.45 0 top
JP243  STAND-OFF  [STAND-OFF]  92.71,87.12 0 top
JP244  STAND-OFF  [STAND-OFF]  107.95,87.12 0 top
JP245  FIDUCIAL1X2  [FIDUCIAL-1X2]  91.44,84.58 0 top
JP246  FIDUCIAL1X2  [FIDUCIAL-1X2]  109.22,74.42 0 top
JP247  STAND-OFF  [STAND-OFF]  107.95,71.88 0 top
JP248  STAND-OFF  [STAND-OFF]  92.71,71.88 0 top
JP249  FIDUCIAL1X2  [FIDUCIAL-1X2]  91.44,84.58 0 bottom
JP250  FIDUCIAL1X2  [FIDUCIAL-1X2]  109.22,74.42 0 bottom
JP251  JUMPER-SMT_2_NO_NO-SILK  [SMT-JUMPER_2_NO_NO-SILK]  106.17,82.55 180 top
JP252  JUMPER-SMT_3_2-NC_PASTE_NO-SILK  [SMT-JUMPER_3_2-NC_PASTE_NO-SILK]  97.79,74.42 90 top
JP253  JUMPER-SMT_2_NC_PASTE_NO-SILK  [SMT-JUMPER_2_NC_PASTE_NO-SILK]  107.44,76.45 0 top
JP254  STAND-OFF  [STAND-OFF]  113.54,87.12 0 top
JP255  STAND-OFF  [STAND-OFF]  128.78,87.12 0 top
JP256  FIDUCIAL1X2  [FIDUCIAL-1X2]  112.27,84.58 0 top
JP257  FIDUCIAL1X2  [FIDUCIAL-1X2]  130.05,74.42 0 top
JP258  STAND-OFF  [STAND-OFF]  128.78,71.88 0 top
JP259  STAND-OFF  [STAND-OFF]  113.54,71.88 0 top
JP260  FIDUCIAL1X2  [FIDUCIAL-1X2]  112.27,84.58 0 bottom
JP261  FIDUCIAL1X2  [FIDUCIAL-1X2]  130.05,74.42 0 bottom
JP262  JUMPER-SMT_2_NO_NO-SILK  [SMT-JUMPER_2_NO_NO-SILK]  127,82.55 180 top
JP263  JUMPER-SMT_3_2-NC_PASTE_NO-SILK  [SMT-JUMPER_3_2-NC_PASTE_NO-SILK]  118.62,74.42 90 top
JP264  JUMPER-SMT_2_NC_PASTE_NO-SILK  [SMT-JUMPER_2_NC_PASTE_NO-SILK]  128.27,76.45 0 top
JP265  STAND-OFF  [STAND-OFF]  9.4,107.95 0 top
JP266  STAND-OFF  [STAND-OFF]  24.64,107.95 0 top
JP267  FIDUCIAL1X2  [FIDUCIAL-1X2]  8.13,105.41 0 top
JP268  FIDUCIAL1X2  [FIDUCIAL-1X2]  25.91,95.25 0 top
JP269  STAND-OFF  [STAND-OFF]  24.64,92.71 0 top
JP270  STAND-OFF  [STAND-OFF]  9.4,92.71 0 top
JP271  FIDUCIAL1X2  [FIDUCIAL-1X2]  8.13,105.41 0 bottom
JP272  FIDUCIAL1X2  [FIDUCIAL-1X2]  25.91,95.25 0 bottom
JP273  JUMPER-SMT_2_NO_NO-SILK  [SMT-JUMPER_2_NO_NO-SILK]  22.86,103.38 180 top
JP274  JUMPER-SMT_3_2-NC_PASTE_NO-SILK  [SMT-JUMPER_3_2-NC_PASTE_NO-SILK]  14.48,95.25 90 top
JP275  JUMPER-SMT_2_NC_PASTE_NO-SILK  [SMT-JUMPER_2_NC_PASTE_NO-SILK]  24.13,97.28 0 top
JP276  STAND-OFF  [STAND-OFF]  30.23,107.95 0 top
JP277  STAND-OFF  [STAND-OFF]  45.47,107.95 0 top
JP278  FIDUCIAL1X2  [FIDUCIAL-1X2]  28.96,105.41 0 top
JP279  FIDUCIAL1X2  [FIDUCIAL-1X2]  46.74,95.25 0 top
JP280  STAND-OFF  [STAND-OFF]  45.47,92.71 0 top
JP281  STAND-OFF  [STAND-OFF]  30.23,92.71 0 top
JP282  FIDUCIAL1X2  [FIDUCIAL-1X2]  28.96,105.41 0 bottom
JP283  FIDUCIAL1X2  [FIDUCIAL-1X2]  46.74,95.25 0 bottom
JP284  JUMPER-SMT_2_NO_NO-SILK  [SMT-JUMPER_2_NO_NO-SILK]  43.69,103.38 180 top
JP285  JUMPER-SMT_3_2-NC_PASTE_NO-SILK  [SMT-JUMPER_3_2-NC_PASTE_NO-SILK]  35.31,95.25 90 top
JP286  JUMPER-SMT_2_NC_PASTE_NO-SILK  [SMT-JUMPER_2_NC_PASTE_NO-SILK]  44.96,97.28 0 top
JP287  STAND-OFF  [STAND-OFF]  51.05,107.95 0 top
JP288  STAND-OFF  [STAND-OFF]  66.29,107.95 0 top
JP289  FIDUCIAL1X2  [FIDUCIAL-1X2]  49.78,105.41 0 top
JP290  FIDUCIAL1X2  [FIDUCIAL-1X2]  67.56,95.25 0 top
JP291  STAND-OFF  [STAND-OFF]  66.29,92.71 0 top
JP292  STAND-OFF  [STAND-OFF]  51.05,92.71 0 top
JP293  FIDUCIAL1X2  [FIDUCIAL-1X2]  49.78,105.41 0 bottom
JP294  FIDUCIAL1X2  [FIDUCIAL-1X2]  67.56,95.25 0 bottom
JP295  JUMPER-SMT_2_NO_NO-SILK  [SMT-JUMPER_2_NO_NO-SILK]  64.52,103.38 180 top
JP296  JUMPER-SMT_3_2-NC_PASTE_NO-SILK  [SMT-JUMPER_3_2-NC_PASTE_NO-SILK]  56.13,95.25 90 top
JP297  JUMPER-SMT_2_NC_PASTE_NO-SILK  [SMT-JUMPER_2_NC_PASTE_NO-SILK]  65.79,97.28 0 top
JP298  STAND-OFF  [STAND-OFF]  71.88,107.95 0 top
JP299  STAND-OFF  [STAND-OFF]  87.12,107.95 0 top
JP300  FIDUCIAL1X2  [FIDUCIAL-1X2]  70.61,105.41 0 top
JP301  FIDUCIAL1X2  [FIDUCIAL-1X2]  88.39,95.25 0 top
JP302  STAND-OFF  [STAND-OFF]  87.12,92.71 0 top
JP303  STAND-OFF  [STAND-OFF]  71.88,92.71 0 top
JP304  FIDUCIAL1X2  [FIDUCIAL-1X2]  70.61,105.41 0 bottom
JP305  FIDUCIAL1X2  [FIDUCIAL-1X2]  88.39,95.25 0 bottom
JP306  JUMPER-SMT_2_NO_NO-SILK  [SMT-JUMPER_2_NO_NO-SILK]  85.34,103.38 180 top
JP307  JUMPER-SMT_3_2-NC_PASTE_NO-SILK  [SMT-JUMPER_3_2-NC_PASTE_NO-SILK]  76.96,95.25 90 top
JP308  JUMPER-SMT_2_NC_PASTE_NO-SILK  [SMT-JUMPER_2_NC_PASTE_NO-SILK]  86.61,97.28 0 top
JP309  STAND-OFF  [STAND-OFF]  92.71,107.95 0 top
JP310  STAND-OFF  [STAND-OFF]  107.95,107.95 0 top
JP311  FIDUCIAL1X2  [FIDUCIAL-1X2]  91.44,105.41 0 top
JP312  FIDUCIAL1X2  [FIDUCIAL-1X2]  109.22,95.25 0 top
JP313  STAND-OFF  [STAND-OFF]  107.95,92.71 0 top
JP314  STAND-OFF  [STAND-OFF]  92.71,92.71 0 top
JP315  FIDUCIAL1X2  [FIDUCIAL-1X2]  91.44,105.41 0 bottom
JP316  FIDUCIAL1X2  [FIDUCIAL-1X2]  109.22,95.25 0 bottom
JP317  JUMPER-SMT_2_NO_NO-SILK  [SMT-JUMPER_2_NO_NO-SILK]  106.17,103.38 180 top
JP318  JUMPER-SMT_3_2-NC_PASTE_NO-SILK  [SMT-JUMPER_3_2-NC_PASTE_NO-SILK]  97.79,95.25 90 top
JP319  JUMPER-SMT_2_NC_PASTE_NO-SILK  [SMT-JUMPER_2_NC_PASTE_NO-SILK]  107.44,97.28 0 top
JP320  STAND-OFF  [STAND-OFF]  113.54,107.95 0 top
JP321  STAND-OFF  [STAND-OFF]  128.78,107.95 0 top
JP322  FIDUCIAL1X2  [FIDUCIAL-1X2]  112.27,105.41 0 top
JP323  FIDUCIAL1X2  [FIDUCIAL-1X2]  130.05,95.25 0 top
JP324  STAND-OFF  [STAND-OFF]  128.78,92.71 0 top
JP325  STAND-OFF  [STAND-OFF]  113.54,92.71 0 top
JP326  FIDUCIAL1X2  [FIDUCIAL-1X2]  112.27,105.41 0 bottom
JP327  FIDUCIAL1X2  [FIDUCIAL-1X2]  130.05,95.25 0 bottom
JP328  JUMPER-SMT_2_NO_NO-SILK  [SMT-JUMPER_2_NO_NO-SILK]  127,103.38 180 top
JP329  JUMPER-SMT_3_2-NC_PASTE_NO-SILK  [SMT-JUMPER_3_2-NC_PASTE_NO-SILK]  118.62,95.25 90 top
JP330  JUMPER-SMT_2_NC_PASTE_NO-SILK  [SMT-JUMPER_2_NC_PASTE_NO-SILK]  128.27,97.28 0 top
JP331  STAND-OFF  [STAND-OFF]  9.4,128.78 0 top
JP332  STAND-OFF  [STAND-OFF]  24.64,128.78 0 top
JP333  FIDUCIAL1X2  [FIDUCIAL-1X2]  8.13,126.24 0 top
JP334  FIDUCIAL1X2  [FIDUCIAL-1X2]  25.91,116.08 0 top
JP335  STAND-OFF  [STAND-OFF]  24.64,113.54 0 top
JP336  STAND-OFF  [STAND-OFF]  9.4,113.54 0 top
JP337  FIDUCIAL1X2  [FIDUCIAL-1X2]  8.13,126.24 0 bottom
JP338  FIDUCIAL1X2  [FIDUCIAL-1X2]  25.91,116.08 0 bottom
JP339  JUMPER-SMT_2_NO_NO-SILK  [SMT-JUMPER_2_NO_NO-SILK]  22.86,124.21 180 top
JP340  JUMPER-SMT_3_2-NC_PASTE_NO-SILK  [SMT-JUMPER_3_2-NC_PASTE_NO-SILK]  14.48,116.08 90 top
JP341  JUMPER-SMT_2_NC_PASTE_NO-SILK  [SMT-JUMPER_2_NC_PASTE_NO-SILK]  24.13,118.11 0 top
JP342  STAND-OFF  [STAND-OFF]  30.23,128.78 0 top
JP343  STAND-OFF  [STAND-OFF]  45.47,128.78 0 top
JP344  FIDUCIAL1X2  [FIDUCIAL-1X2]  28.96,126.24 0 top
JP345  FIDUCIAL1X2  [FIDUCIAL-1X2]  46.74,116.08 0 top
JP346  STAND-OFF  [STAND-OFF]  45.47,113.54 0 top
JP347  STAND-OFF  [STAND-OFF]  30.23,113.54 0 top
JP348  FIDUCIAL1X2  [FIDUCIAL-1X2]  28.96,126.24 0 bottom
JP349  FIDUCIAL1X2  [FIDUCIAL-1X2]  46.74,116.08 0 bottom
JP350  JUMPER-SMT_2_NO_NO-SILK  [SMT-JUMPER_2_NO_NO-SILK]  43.69,124.21 180 top
JP351  JUMPER-SMT_3_2-NC_PASTE_NO-SILK  [SMT-JUMPER_3_2-NC_PASTE_NO-SILK]  35.31,116.08 90 top
JP352  JUMPER-SMT_2_NC_PASTE_NO-SILK  [SMT-JUMPER_2_NC_PASTE_NO-SILK]  44.96,118.11 0 top
JP353  STAND-OFF  [STAND-OFF]  51.05,128.78 0 top
JP354  STAND-OFF  [STAND-OFF]  66.29,128.78 0 top
JP355  FIDUCIAL1X2  [FIDUCIAL-1X2]  49.78,126.24 0 top
JP356  FIDUCIAL1X2  [FIDUCIAL-1X2]  67.56,116.08 0 top
JP357  STAND-OFF  [STAND-OFF]  66.29,113.54 0 top
JP358  STAND-OFF  [STAND-OFF]  51.05,113.54 0 top
JP359  FIDUCIAL1X2  [FIDUCIAL-1X2]  49.78,126.24 0 bottom
JP360  FIDUCIAL1X2  [FIDUCIAL-1X2]  67.56,116.08 0 bottom
JP361  JUMPER-SMT_2_NO_NO-SILK  [SMT-JUMPER_2_NO_NO-SILK]  64.52,124.21 180 top
JP362  JUMPER-SMT_3_2-NC_PASTE_NO-SILK  [SMT-JUMPER_3_2-NC_PASTE_NO-SILK]  56.13,116.08 90 top
JP363  JUMPER-SMT_2_NC_PASTE_NO-SILK  [SMT-JUMPER_2_NC_PASTE_NO-SILK]  65.79,118.11 0 top
JP364  STAND-OFF  [STAND-OFF]  71.88,128.78 0 top
JP365  STAND-OFF  [STAND-OFF]  87.12,128.78 0 top
JP366  FIDUCIAL1X2  [FIDUCIAL-1X2]  70.61,126.24 0 top
JP367  FIDUCIAL1X2  [FIDUCIAL-1X2]  88.39,116.08 0 top
JP368  STAND-OFF  [STAND-OFF]  87.12,113.54 0 top
JP369  STAND-OFF  [STAND-OFF]  71.88,113.54 0 top
JP370  FIDUCIAL1X2  [FIDUCIAL-1X2]  70.61,126.24 0 bottom
JP371  FIDUCIAL1X2  [FIDUCIAL-1X2]  88.39,116.08 0 bottom
JP372  JUMPER-SMT_2_NO_NO-SILK  [SMT-JUMPER_2_NO_NO-SILK]  85.34,124.21 180 top
JP373  JUMPER-SMT_3_2-NC_PASTE_NO-SILK  [SMT-JUMPER_3_2-NC_PASTE_NO-SILK]  76.96,116.08 90 top
JP374  JUMPER-SMT_2_NC_PASTE_NO-SILK  [SMT-JUMPER_2_NC_PASTE_NO-SILK]  86.61,118.11 0 top
JP375  STAND-OFF  [STAND-OFF]  92.71,128.78 0 top
JP376  STAND-OFF  [STAND-OFF]  107.95,128.78 0 top
JP377  FIDUCIAL1X2  [FIDUCIAL-1X2]  91.44,126.24 0 top
JP378  FIDUCIAL1X2  [FIDUCIAL-1X2]  109.22,116.08 0 top
JP379  STAND-OFF  [STAND-OFF]  107.95,113.54 0 top
JP380  STAND-OFF  [STAND-OFF]  92.71,113.54 0 top
JP381  FIDUCIAL1X2  [FIDUCIAL-1X2]  91.44,126.24 0 bottom
JP382  FIDUCIAL1X2  [FIDUCIAL-1X2]  109.22,116.08 0 bottom
JP383  JUMPER-SMT_2_NO_NO-SILK  [SMT-JUMPER_2_NO_NO-SILK]  106.17,124.21 180 top
JP384  JUMPER-SMT_3_2-NC_PASTE_NO-SILK  [SMT-JUMPER_3_2-NC_PASTE_NO-SILK]  97.79,116.08 90 top
JP385  JUMPER-SMT_2_NC_PASTE_NO-SILK  [SMT-JUMPER_2_NC_PASTE_NO-SILK]  107.44,118.11 0 top
JP386  STAND-OFF  [STAND-OFF]  113.54,128.78 0 top
JP387  STAND-OFF  [STAND-OFF]  128.78,128.78 0 top
JP388  FIDUCIAL1X2  [FIDUCIAL-1X2]  112.27,126.24 0 top
JP389  FIDUCIAL1X2  [FIDUCIAL-1X2]  130.05,116.08 0 top
JP390  STAND-OFF  [STAND-OFF]  128.78,113.54 0 top
JP391  STAND-OFF  [STAND-OFF]  113.54,113.54 0 top
JP392  FIDUCIAL1X2  [FIDUCIAL-1X2]  112.27,126.24 0 bottom
JP393  FIDUCIAL1X2  [FIDUCIAL-1X2]  130.05,116.08 0 bottom
JP394  JUMPER-SMT_2_NO_NO-SILK  [SMT-JUMPER_2_NO_NO-SILK]  127,124.21 180 top
JP395  JUMPER-SMT_3_2-NC_PASTE_NO-SILK  [SMT-JUMPER_3_2-NC_PASTE_NO-SILK]  118.62,116.08 90 top
JP396  JUMPER-SMT_2_NC_PASTE_NO-SILK  [SMT-JUMPER_2_NC_PASTE_NO-SILK]  128.27,118.11 0 top
JP397  STAND-OFF  [STAND-OFF]  9.4,149.61 0 top
JP398  STAND-OFF  [STAND-OFF]  24.64,149.61 0 top
JP399  FIDUCIAL1X2  [FIDUCIAL-1X2]  8.13,147.07 0 top
JP400  FIDUCIAL1X2  [FIDUCIAL-1X2]  25.91,136.91 0 top
JP401  STAND-OFF  [STAND-OFF]  24.64,134.37 0 top
JP402  STAND-OFF  [STAND-OFF]  9.4,134.37 0 top
JP403  FIDUCIAL1X2  [FIDUCIAL-1X2]  8.13,147.07 0 bottom
JP404  FIDUCIAL1X2  [FIDUCIAL-1X2]  25.91,136.91 0 bottom
JP405  JUMPER-SMT_2_NO_NO-SILK  [SMT-JUMPER_2_NO_NO-SILK]  22.86,145.03 180 top
JP406  JUMPER-SMT_3_2-NC_PASTE_NO-SILK  [SMT-JUMPER_3_2-NC_PASTE_NO-SILK]  14.48,136.91 90 top
JP407  JUMPER-SMT_2_NC_PASTE_NO-SILK  [SMT-JUMPER_2_NC_PASTE_NO-SILK]  24.13,138.94 0 top
JP408  STAND-OFF  [STAND-OFF]  30.23,149.61 0 top
JP409  STAND-OFF  [STAND-OFF]  45.47,149.61 0 top
JP410  FIDUCIAL1X2  [FIDUCIAL-1X2]  28.96,147.07 0 top
JP411  FIDUCIAL1X2  [FIDUCIAL-1X2]  46.74,136.91 0 top
JP412  STAND-OFF  [STAND-OFF]  45.47,134.37 0 top
JP413  STAND-OFF  [STAND-OFF]  30.23,134.37 0 top
JP414  FIDUCIAL1X2  [FIDUCIAL-1X2]  28.96,147.07 0 bottom
JP415  FIDUCIAL1X2  [FIDUCIAL-1X2]  46.74,136.91 0 bottom
JP416  JUMPER-SMT_2_NO_NO-SILK  [SMT-JUMPER_2_NO_NO-SILK]  43.69,145.03 180 top
JP417  JUMPER-SMT_3_2-NC_PASTE_NO-SILK  [SMT-JUMPER_3_2-NC_PASTE_NO-SILK]  35.31,136.91 90 top
JP418  JUMPER-SMT_2_NC_PASTE_NO-SILK  [SMT-JUMPER_2_NC_PASTE_NO-SILK]  44.96,138.94 0 top
JP419  STAND-OFF  [STAND-OFF]  51.05,149.61 0 top
JP420  STAND-OFF  [STAND-OFF]  66.29,149.61 0 top
JP421  FIDUCIAL1X2  [FIDUCIAL-1X2]  49.78,147.07 0 top
JP422  FIDUCIAL1X2  [FIDUCIAL-1X2]  67.56,136.91 0 top
JP423  STAND-OFF  [STAND-OFF]  66.29,134.37 0 top
JP424  STAND-OFF  [STAND-OFF]  51.05,134.37 0 top
JP425  FIDUCIAL1X2  [FIDUCIAL-1X2]  49.78,147.07 0 bottom
JP426  FIDUCIAL1X2  [FIDUCIAL-1X2]  67.56,136.91 0 bottom
JP427  JUMPER-SMT_2_NO_NO-SILK  [SMT-JUMPER_2_NO_NO-SILK]  64.52,145.03 180 top
JP428  JUMPER-SMT_3_2-NC_PASTE_NO-SILK  [SMT-JUMPER_3_2-NC_PASTE_NO-SILK]  56.13,136.91 90 top
JP429  JUMPER-SMT_2_NC_PASTE_NO-SILK  [SMT-JUMPER_2_NC_PASTE_NO-SILK]  65.79,138.94 0 top
JP430  STAND-OFF  [STAND-OFF]  71.88,149.61 0 top
JP431  STAND-OFF  [STAND-OFF]  87.12,149.61 0 top
JP432  FIDUCIAL1X2  [FIDUCIAL-1X2]  70.61,147.07 0 top
JP433  FIDUCIAL1X2  [FIDUCIAL-1X2]  88.39,136.91 0 top
JP434  STAND-OFF  [STAND-OFF]  87.12,134.37 0 top
JP435  STAND-OFF  [STAND-OFF]  71.88,134.37 0 top
JP436  FIDUCIAL1X2  [FIDUCIAL-1X2]  70.61,147.07 0 bottom
JP437  FIDUCIAL1X2  [FIDUCIAL-1X2]  88.39,136.91 0 bottom
JP438  JUMPER-SMT_2_NO_NO-SILK  [SMT-JUMPER_2_NO_NO-SILK]  85.34,145.03 180 top
JP439  JUMPER-SMT_3_2-NC_PASTE_NO-SILK  [SMT-JUMPER_3_2-NC_PASTE_NO-SILK]  76.96,136.91 90 top
JP440  JUMPER-SMT_2_NC_PASTE_NO-SILK  [SMT-JUMPER_2_NC_PASTE_NO-SILK]  86.61,138.94 0 top
JP441  STAND-OFF  [STAND-OFF]  92.71,149.61 0 top
JP442  STAND-OFF  [STAND-OFF]  107.95,149.61 0 top
JP443  FIDUCIAL1X2  [FIDUCIAL-1X2]  91.44,147.07 0 top
JP444  FIDUCIAL1X2  [FIDUCIAL-1X2]  109.22,136.91 0 top
JP445  STAND-OFF  [STAND-OFF]  107.95,134.37 0 top
JP446  STAND-OFF  [STAND-OFF]  92.71,134.37 0 top
JP447  FIDUCIAL1X2  [FIDUCIAL-1X2]  91.44,147.07 0 bottom
JP448  FIDUCIAL1X2  [FIDUCIAL-1X2]  109.22,136.91 0 bottom
JP449  JUMPER-SMT_2_NO_NO-SILK  [SMT-JUMPER_2_NO_NO-SILK]  106.17,145.03 180 top
JP450  JUMPER-SMT_3_2-NC_PASTE_NO-SILK  [SMT-JUMPER_3_2-NC_PASTE_NO-SILK]  97.79,136.91 90 top
JP451  JUMPER-SMT_2_NC_PASTE_NO-SILK  [SMT-JUMPER_2_NC_PASTE_NO-SILK]  107.44,138.94 0 top
JP452  STAND-OFF  [STAND-OFF]  113.54,149.61 0 top
JP453  STAND-OFF  [STAND-OFF]  128.78,149.61 0 top
JP454  FIDUCIAL1X2  [FIDUCIAL-1X2]  112.27,147.07 0 top
JP455  FIDUCIAL1X2  [FIDUCIAL-1X2]  130.05,136.91 0 top
JP456  STAND-OFF  [STAND-OFF]  128.78,134.37 0 top
JP457  STAND-OFF  [STAND-OFF]  113.54,134.37 0 top
JP458  FIDUCIAL1X2  [FIDUCIAL-1X2]  112.27,147.07 0 bottom
JP459  FIDUCIAL1X2  [FIDUCIAL-1X2]  130.05,136.91 0 bottom
JP460  JUMPER-SMT_2_NO_NO-SILK  [SMT-JUMPER_2_NO_NO-SILK]  127,145.03 180 top
JP461  JUMPER-SMT_3_2-NC_PASTE_NO-SILK  [SMT-JUMPER_3_2-NC_PASTE_NO-SILK]  118.62,136.91 90 top
JP462  JUMPER-SMT_2_NC_PASTE_NO-SILK  [SMT-JUMPER_2_NC_PASTE_NO-SILK]  128.27,138.94 0 top
JP463  STAND-OFF  [STAND-OFF]  9.4,170.43 0 top
JP464  STAND-OFF  [STAND-OFF]  24.64,170.43 0 top
JP465  FIDUCIAL1X2  [FIDUCIAL-1X2]  8.13,167.89 0 top
JP466  FIDUCIAL1X2  [FIDUCIAL-1X2]  25.91,157.73 0 top
JP467  STAND-OFF  [STAND-OFF]  24.64,155.19 0 top
JP468  STAND-OFF  [STAND-OFF]  9.4,155.19 0 top
JP469  FIDUCIAL1X2  [FIDUCIAL-1X2]  8.13,167.89 0 bottom
JP470  FIDUCIAL1X2  [FIDUCIAL-1X2]  25.91,157.73 0 bottom
JP471  JUMPER-SMT_2_NO_NO-SILK  [SMT-JUMPER_2_NO_NO-SILK]  22.86,165.86 180 top
JP472  JUMPER-SMT_3_2-NC_PASTE_NO-SILK  [SMT-JUMPER_3_2-NC_PASTE_NO-SILK]  14.48,157.73 90 top
JP473  JUMPER-SMT_2_NC_PASTE_NO-SILK  [SMT-JUMPER_2_NC_PASTE_NO-SILK]  24.13,159.77 0 top
JP474  STAND-OFF  [STAND-OFF]  30.23,170.43 0 top
JP475  STAND-OFF  [STAND-OFF]  45.47,170.43 0 top
JP476  FIDUCIAL1X2  [FIDUCIAL-1X2]  28.96,167.89 0 top
JP477  FIDUCIAL1X2  [FIDUCIAL-1X2]  46.74,157.73 0 top
JP478  STAND-OFF  [STAND-OFF]  45.47,155.19 0 top
JP479  STAND-OFF  [STAND-OFF]  30.23,155.19 0 top
JP480  FIDUCIAL1X2  [FIDUCIAL-1X2]  28.96,167.89 0 bottom
JP481  FIDUCIAL1X2  [FIDUCIAL-1X2]  46.74,157.73 0 bottom
JP482  JUMPER-SMT_2_NO_NO-SILK  [SMT-JUMPER_2_NO_NO-SILK]  43.69,165.86 180 top
JP483  JUMPER-SMT_3_2-NC_PASTE_NO-SILK  [SMT-JUMPER_3_2-NC_PASTE_NO-SILK]  35.31,157.73 90 top
JP484  JUMPER-SMT_2_NC_PASTE_NO-SILK  [SMT-JUMPER_2_NC_PASTE_NO-SILK]  44.96,159.77 0 top
JP485  STAND-OFF  [STAND-OFF]  51.05,170.43 0 top
JP486  STAND-OFF  [STAND-OFF]  66.29,170.43 0 top
JP487  FIDUCIAL1X2  [FIDUCIAL-1X2]  49.78,167.89 0 top
JP488  FIDUCIAL1X2  [FIDUCIAL-1X2]  67.56,157.73 0 top
JP489  STAND-OFF  [STAND-OFF]  66.29,155.19 0 top
JP490  STAND-OFF  [STAND-OFF]  51.05,155.19 0 top
JP491  FIDUCIAL1X2  [FIDUCIAL-1X2]  49.78,167.89 0 bottom
JP492  FIDUCIAL1X2  [FIDUCIAL-1X2]  67.56,157.73 0 bottom
JP493  JUMPER-SMT_2_NO_NO-SILK  [SMT-JUMPER_2_NO_NO-SILK]  64.52,165.86 180 top
JP494  JUMPER-SMT_3_2-NC_PASTE_NO-SILK  [SMT-JUMPER_3_2-NC_PASTE_NO-SILK]  56.13,157.73 90 top
JP495  JUMPER-SMT_2_NC_PASTE_NO-SILK  [SMT-JUMPER_2_NC_PASTE_NO-SILK]  65.79,159.77 0 top
JP496  STAND-OFF  [STAND-OFF]  71.88,170.43 0 top
JP497  STAND-OFF  [STAND-OFF]  87.12,170.43 0 top
JP498  FIDUCIAL1X2  [FIDUCIAL-1X2]  70.61,167.89 0 top
JP499  FIDUCIAL1X2  [FIDUCIAL-1X2]  88.39,157.73 0 top
JP500  STAND-OFF  [STAND-OFF]  87.12,155.19 0 top
JP501  STAND-OFF  [STAND-OFF]  71.88,155.19 0 top
JP502  FIDUCIAL1X2  [FIDUCIAL-1X2]  70.61,167.89 0 bottom
JP503  FIDUCIAL1X2  [FIDUCIAL-1X2]  88.39,157.73 0 bottom
JP504  JUMPER-SMT_2_NO_NO-SILK  [SMT-JUMPER_2_NO_NO-SILK]  85.34,165.86 180 top
JP505  JUMPER-SMT_3_2-NC_PASTE_NO-SILK  [SMT-JUMPER_3_2-NC_PASTE_NO-SILK]  76.96,157.73 90 top
JP506  JUMPER-SMT_2_NC_PASTE_NO-SILK  [SMT-JUMPER_2_NC_PASTE_NO-SILK]  86.61,159.77 0 top
JP507  STAND-OFF  [STAND-OFF]  92.71,170.43 0 top
JP508  STAND-OFF  [STAND-OFF]  107.95,170.43 0 top
JP509  FIDUCIAL1X2  [FIDUCIAL-1X2]  91.44,167.89 0 top
JP510  FIDUCIAL1X2  [FIDUCIAL-1X2]  109.22,157.73 0 top
JP511  STAND-OFF  [STAND-OFF]  107.95,155.19 0 top
JP512  STAND-OFF  [STAND-OFF]  92.71,155.19 0 top
JP513  FIDUCIAL1X2  [FIDUCIAL-1X2]  91.44,167.89 0 bottom
JP514  FIDUCIAL1X2  [FIDUCIAL-1X2]  109.22,157.73 0 bottom
JP515  JUMPER-SMT_2_NO_NO-SILK  [SMT-JUMPER_2_NO_NO-SILK]  106.17,165.86 180 top
JP516  JUMPER-SMT_3_2-NC_PASTE_NO-SILK  [SMT-JUMPER_3_2-NC_PASTE_NO-SILK]  97.79,157.73 90 top
JP517  JUMPER-SMT_2_NC_PASTE_NO-SILK  [SMT-JUMPER_2_NC_PASTE_NO-SILK]  107.44,159.77 0 top
JP518  STAND-OFF  [STAND-OFF]  113.54,170.43 0 top
JP519  STAND-OFF  [STAND-OFF]  128.78,170.43 0 top
JP520  FIDUCIAL1X2  [FIDUCIAL-1X2]  112.27,167.89 0 top
JP521  FIDUCIAL1X2  [FIDUCIAL-1X2]  130.05,157.73 0 top
JP522  STAND-OFF  [STAND-OFF]  128.78,155.19 0 top
JP523  STAND-OFF  [STAND-OFF]  113.54,155.19 0 top
JP524  FIDUCIAL1X2  [FIDUCIAL-1X2]  112.27,167.89 0 bottom
JP525  FIDUCIAL1X2  [FIDUCIAL-1X2]  130.05,157.73 0 bottom
JP526  JUMPER-SMT_2_NO_NO-SILK  [SMT-JUMPER_2_NO_NO-SILK]  127,165.86 180 top
JP527  JUMPER-SMT_3_2-NC_PASTE_NO-SILK  [SMT-JUMPER_3_2-NC_PASTE_NO-SILK]  118.62,157.73 90 top
JP528  JUMPER-SMT_2_NC_PASTE_NO-SILK  [SMT-JUMPER_2_NC_PASTE_NO-SILK]  128.27,159.77 0 top
LOGO1  SFE_LOGO_FLAME.1_INCH  [SFE_LOGO_FLAME_.1]  8.13,18.29 0 top
LOGO2  OSHW-LOGOS  [OSHW-LOGO-S]  9.65,13.08 0 top
LOGO3  OSHW-LOGOS  [OSHW-LOGO-S]  30.48,13.08 0 top
LOGO4  SFE_LOGO_FLAME.1_INCH  [SFE_LOGO_FLAME_.1]  28.96,18.29 0 top
LOGO5  OSHW-LOGOS  [OSHW-LOGO-S]  51.31,13.08 0 top
LOGO6  SFE_LOGO_FLAME.1_INCH  [SFE_LOGO_FLAME_.1]  49.78,18.29 0 top
LOGO7  OSHW-LOGOS  [OSHW-LOGO-S]  72.14,13.08 0 top
LOGO8  SFE_LOGO_FLAME.1_INCH  [SFE_LOGO_FLAME_.1]  70.61,18.29 0 top
LOGO9  OSHW-LOGOS  [OSHW-LOGO-S]  92.96,13.08 0 top
LOGO10  SFE_LOGO_FLAME.1_INCH  [SFE_LOGO_FLAME_.1]  91.44,18.29 0 top
LOGO11  OSHW-LOGOS  [OSHW-LOGO-S]  113.79,13.08 0 top
LOGO12  SFE_LOGO_FLAME.1_INCH  [SFE_LOGO_FLAME_.1]  112.27,18.29 0 top
LOGO13  OSHW-LOGOS  [OSHW-LOGO-S]  9.65,33.91 0 top
LOGO14  SFE_LOGO_FLAME.1_INCH  [SFE_LOGO_FLAME_.1]  8.13,39.12 0 top
LOGO15  OSHW-LOGOS  [OSHW-LOGO-S]  30.48,33.91 0 top
LOGO16  SFE_LOGO_FLAME.1_INCH  [SFE_LOGO_FLAME_.1]  28.96,39.12 0 top
LOGO17  OSHW-LOGOS  [OSHW-LOGO-S]  51.31,33.91 0 top
LOGO18  SFE_LOGO_FLAME.1_INCH  [SFE_LOGO_FLAME_.1]  49.78,39.12 0 top
LOGO19  OSHW-LOGOS  [OSHW-LOGO-S]  72.14,33.91 0 top
LOGO20  SFE_LOGO_FLAME.1_INCH  [SFE_LOGO_FLAME_.1]  70.61,39.12 0 top
LOGO21  OSHW-LOGOS  [OSHW-LOGO-S]  92.96,33.91 0 top
LOGO22  SFE_LOGO_FLAME.1_INCH  [SFE_LOGO_FLAME_.1]  91.44,39.12 0 top
LOGO23  OSHW-LOGOS  [OSHW-LOGO-S]  113.79,33.91 0 top
LOGO24  SFE_LOGO_FLAME.1_INCH  [SFE_LOGO_FLAME_.1]  112.27,39.12 0 top
LOGO25  OSHW-LOGOS  [OSHW-LOGO-S]  9.65,54.74 0 top
LOGO26  SFE_LOGO_FLAME.1_INCH  [SFE_LOGO_FLAME_.1]  8.13,59.94 0 top
LOGO27  OSHW-LOGOS  [OSHW-LOGO-S]  30.48,54.74 0 top
LOGO28  SFE_LOGO_FLAME.1_INCH  [SFE_LOGO_FLAME_.1]  28.96,59.94 0 top
LOGO29  OSHW-LOGOS  [OSHW-LOGO-S]  51.31,54.74 0 top
LOGO30  SFE_LOGO_FLAME.1_INCH  [SFE_LOGO_FLAME_.1]  49.78,59.94 0 top
LOGO31  OSHW-LOGOS  [OSHW-LOGO-S]  72.14,54.74 0 top
LOGO32  SFE_LOGO_FLAME.1_INCH  [SFE_LOGO_FLAME_.1]  70.61,59.94 0 top
LOGO33  OSHW-LOGOS  [OSHW-LOGO-S]  92.96,54.74 0 top
LOGO34  SFE_LOGO_FLAME.1_INCH  [SFE_LOGO_FLAME_.1]  91.44,59.94 0 top
LOGO35  OSHW-LOGOS  [OSHW-LOGO-S]  113.79,54.74 0 top
LOGO36  SFE_LOGO_FLAME.1_INCH  [SFE_LOGO_FLAME_.1]  112.27,59.94 0 top
LOGO37  OSHW-LOGOS  [OSHW-LOGO-S]  9.65,75.56 0 top
LOGO38  SFE_LOGO_FLAME.1_INCH  [SFE_LOGO_FLAME_.1]  8.13,80.77 0 top
LOGO39  OSHW-LOGOS  [OSHW-LOGO-S]  30.48,75.56 0 top
LOGO40  SFE_LOGO_FLAME.1_INCH  [SFE_LOGO_FLAME_.1]  28.96,80.77 0 top
LOGO41  OSHW-LOGOS  [OSHW-LOGO-S]  51.31,75.56 0 top
LOGO42  SFE_LOGO_FLAME.1_INCH  [SFE_LOGO_FLAME_.1]  49.78,80.77 0 top
LOGO43  OSHW-LOGOS  [OSHW-LOGO-S]  72.14,75.56 0 top
LOGO44  SFE_LOGO_FLAME.1_INCH  [SFE_LOGO_FLAME_.1]  70.61,80.77 0 top
LOGO45  OSHW-LOGOS  [OSHW-LOGO-S]  92.96,75.56 0 top
LOGO46  SFE_LOGO_FLAME.1_INCH  [SFE_LOGO_FLAME_.1]  91.44,80.77 0 top
LOGO47  OSHW-LOGOS  [OSHW-LOGO-S]  113.79,75.56 0 top
LOGO48  SFE_LOGO_FLAME.1_INCH  [SFE_LOGO_FLAME_.1]  112.27,80.77 0 top
LOGO49  OSHW-LOGOS  [OSHW-LOGO-S]  9.65,96.39 0 top
LOGO50  SFE_LOGO_FLAME.1_INCH  [SFE_LOGO_FLAME_.1]  8.13,101.6 0 top
LOGO51  OSHW-LOGOS  [OSHW-LOGO-S]  30.48,96.39 0 top
LOGO52  SFE_LOGO_FLAME.1_INCH  [SFE_LOGO_FLAME_.1]  28.96,101.6 0 top
LOGO53  OSHW-LOGOS  [OSHW-LOGO-S]  51.31,96.39 0 top
LOGO54  SFE_LOGO_FLAME.1_INCH  [SFE_LOGO_FLAME_.1]  49.78,101.6 0 top
LOGO55  OSHW-LOGOS  [OSHW-LOGO-S]  72.14,96.39 0 top
LOGO56  SFE_LOGO_FLAME.1_INCH  [SFE_LOGO_FLAME_.1]  70.61,101.6 0 top
LOGO57  OSHW-LOGOS  [OSHW-LOGO-S]  92.96,96.39 0 top
LOGO58  SFE_LOGO_FLAME.1_INCH  [SFE_LOGO_FLAME_.1]  91.44,101.6 0 top
LOGO59  OSHW-LOGOS  [OSHW-LOGO-S]  113.79,96.39 0 top
LOGO60  SFE_LOGO_FLAME.1_INCH  [SFE_LOGO_FLAME_.1]  112.27,101.6 0 top
LOGO61  OSHW-LOGOS  [OSHW-LOGO-S]  9.65,117.22 0 top
LOGO62  SFE_LOGO_FLAME.1_INCH  [SFE_LOGO_FLAME_.1]  8.13,122.43 0 top
LOGO63  OSHW-LOGOS  [OSHW-LOGO-S]  30.48,117.22 0 top
LOGO64  SFE_LOGO_FLAME.1_INCH  [SFE_LOGO_FLAME_.1]  28.96,122.43 0 top
LOGO65  OSHW-LOGOS  [OSHW-LOGO-S]  51.31,117.22 0 top
LOGO66  SFE_LOGO_FLAME.1_INCH  [SFE_LOGO_FLAME_.1]  49.78,122.43 0 top
LOGO67  OSHW-LOGOS  [OSHW-LOGO-S]  72.14,117.22 0 top
LOGO68  SFE_LOGO_FLAME.1_INCH  [SFE_LOGO_FLAME_.1]  70.61,122.43 0 top
LOGO69  OSHW-LOGOS  [OSHW-LOGO-S]  92.96,117.22 0 top
LOGO70  SFE_LOGO_FLAME.1_INCH  [SFE_LOGO_FLAME_.1]  91.44,122.43 0 top
LOGO71  OSHW-LOGOS  [OSHW-LOGO-S]  113.79,117.22 0 top
LOGO72  SFE_LOGO_FLAME.1_INCH  [SFE_LOGO_FLAME_.1]  112.27,122.43 0 top
LOGO73  OSHW-LOGOS  [OSHW-LOGO-S]  9.65,138.05 0 top
LOGO74  SFE_LOGO_FLAME.1_INCH  [SFE_LOGO_FLAME_.1]  8.13,143.26 0 top
LOGO75  OSHW-LOGOS  [OSHW-LOGO-S]  30.48,138.05 0 top
LOGO76  SFE_LOGO_FLAME.1_INCH  [SFE_LOGO_FLAME_.1]  28.96,143.26 0 top
LOGO77  OSHW-LOGOS  [OSHW-LOGO-S]  51.31,138.05 0 top
LOGO78  SFE_LOGO_FLAME.1_INCH  [SFE_LOGO_FLAME_.1]  49.78,143.26 0 top
LOGO79  OSHW-LOGOS  [OSHW-LOGO-S]  72.14,138.05 0 top
LOGO80  SFE_LOGO_FLAME.1_INCH  [SFE_LOGO_FLAME_.1]  70.61,143.26 0 top
LOGO81  OSHW-LOGOS  [OSHW-LOGO-S]  92.96,138.05 0 top
LOGO82  SFE_LOGO_FLAME.1_INCH  [SFE_LOGO_FLAME_.1]  91.44,143.26 0 top
LOGO83  OSHW-LOGOS  [OSHW-LOGO-S]  113.79,138.05 0 top
LOGO84  SFE_LOGO_FLAME.1_INCH  [SFE_LOGO_FLAME_.1]  112.27,143.26 0 top
LOGO85  OSHW-LOGOS  [OSHW-LOGO-S]  9.65,158.88 0 top
LOGO86  SFE_LOGO_FLAME.1_INCH  [SFE_LOGO_FLAME_.1]  8.13,164.08 0 top
LOGO87  OSHW-LOGOS  [OSHW-LOGO-S]  30.48,158.88 0 top
LOGO88  SFE_LOGO_FLAME.1_INCH  [SFE_LOGO_FLAME_.1]  28.96,164.08 0 top
LOGO89  OSHW-LOGOS  [OSHW-LOGO-S]  51.31,158.88 0 top
LOGO90  SFE_LOGO_FLAME.1_INCH  [SFE_LOGO_FLAME_.1]  49.78,164.08 0 top
LOGO91  OSHW-LOGOS  [OSHW-LOGO-S]  72.14,158.88 0 top
LOGO92  SFE_LOGO_FLAME.1_INCH  [SFE_LOGO_FLAME_.1]  70.61,164.08 0 top
LOGO93  OSHW-LOGOS  [OSHW-LOGO-S]  92.96,158.88 0 top
LOGO94  SFE_LOGO_FLAME.1_INCH  [SFE_LOGO_FLAME_.1]  91.44,164.08 0 top
LOGO95  OSHW-LOGOS  [OSHW-LOGO-S]  113.79,158.88 0 top
LOGO96  SFE_LOGO_FLAME.1_INCH  [SFE_LOGO_FLAME_.1]  112.27,164.08 0 top
R1  10k  [0603]  22.1,13.34 90 top
R2  4.7k  [0603]  17.91,12.83 0 top
R3  4.7k  [0603]  17.91,11.05 0 top
R4  10k  [0603]  20.83,20.83 90 top
R5  10k  [0603]  41.66,20.83 90 top
R6  4.7k  [0603]  38.73,12.83 0 top
R7  4.7k  [0603]  38.73,11.05 0 top
R8  10k  [0603]  42.93,13.34 90 top
R9  10k  [0603]  62.48,20.83 90 top
R10  4.7k  [0603]  59.56,12.83 0 top
R11  4.7k  [0603]  59.56,11.05 0 top
R12  10k  [0603]  63.75,13.34 90 top
R13  10k  [0603]  83.31,20.83 90 top
R14  4.7k  [0603]  80.39,12.83 0 top
R15  4.7k  [0603]  80.39,11.05 0 top
R16  10k  [0603]  84.58,13.34 90 top
R17  10k  [0603]  104.14,20.83 90 top
R18  4.7k  [0603]  101.22,12.83 0 top
R19  4.7k  [0603]  101.22,11.05 0 top
R20  10k  [0603]  105.41,13.34 90 top
R21  10k  [0603]  124.97,20.83 90 top
R22  4.7k  [0603]  122.05,12.83 0 top
R23  4.7k  [0603]  122.05,11.05 0 top
R24  10k  [0603]  126.24,13.34 90 top
R25  10k  [0603]  20.83,41.66 90 top
R26  4.7k  [0603]  17.91,33.66 0 top
R27  4.7k  [0603]  17.91,31.88 0 top
R28  10k  [0603]  22.1,34.16 90 top
R29  10k  [0603]  41.66,41.66 90 top
R30  4.7k  [0603]  38.73,33.66 0 top
R31  4.7k  [0603]  38.73,31.88 0 top
R32  10k  [0603]  42.93,34.16 90 top
R33  10k  [0603]  62.48,41.66 90 top
R34  4.7k  [0603]  59.56,33.66 0 top
R35  4.7k  [0603]  59.56,31.88 0 top
R36  10k  [0603]  63.75,34.16 90 top
R37  10k  [0603]  83.31,41.66 90 top
R38  4.7k  [0603]  80.39,33.66 0 top
R39  4.7k  [0603]  80.39,31.88 0 top
R40  10k  [0603]  84.58,34.16 90 top
R41  10k  [0603]  104.14,41.66 90 top
R42  4.7k  [0603]  101.22,33.66 0 top
R43  4.7k  [0603]  101.22,31.88 0 top
R44  10k  [0603]  105.41,34.16 90 top
R45  10k  [0603]  124.97,41.66 90 top
R46  4.7k  [0603]  122.05,33.66 0 top
R47  4.7k  [0603]  122.05,31.88 0 top
R48  10k  [0603]  126.24,34.16 90 top
R49  10k  [0603]  20.83,62.48 90 top
R50  4.7k  [0603]  17.91,54.48 0 top
R51  4.7k  [0603]  17.91,52.7 0 top
R52  10k  [0603]  22.1,54.99 90 top
R53  10k  [0603]  41.66,62.48 90 top
R54  4.7k  [0603]  38.73,54.48 0 top
R55  4.7k  [0603]  38.73,52.7 0 top
R56  10k  [0603]  42.93,54.99 90 top
R57  10k  [0603]  62.48,62.48 90 top
R58  4.7k  [0603]  59.56,54.48 0 top
R59  4.7k  [0603]  59.56,52.7 0 top
R60  10k  [0603]  63.75,54.99 90 top
R61  10k  [0603]  83.31,62.48 90 top
R62  4.7k  [0603]  80.39,54.48 0 top
R63  4.7k  [0603]  80.39,52.7 0 top
R64  10k  [0603]  84.58,54.99 90 top
R65  10k  [0603]  104.14,62.48 90 top
R66  4.7k  [0603]  101.22,54.48 0 top